# Allegro board pmtpulser.brd
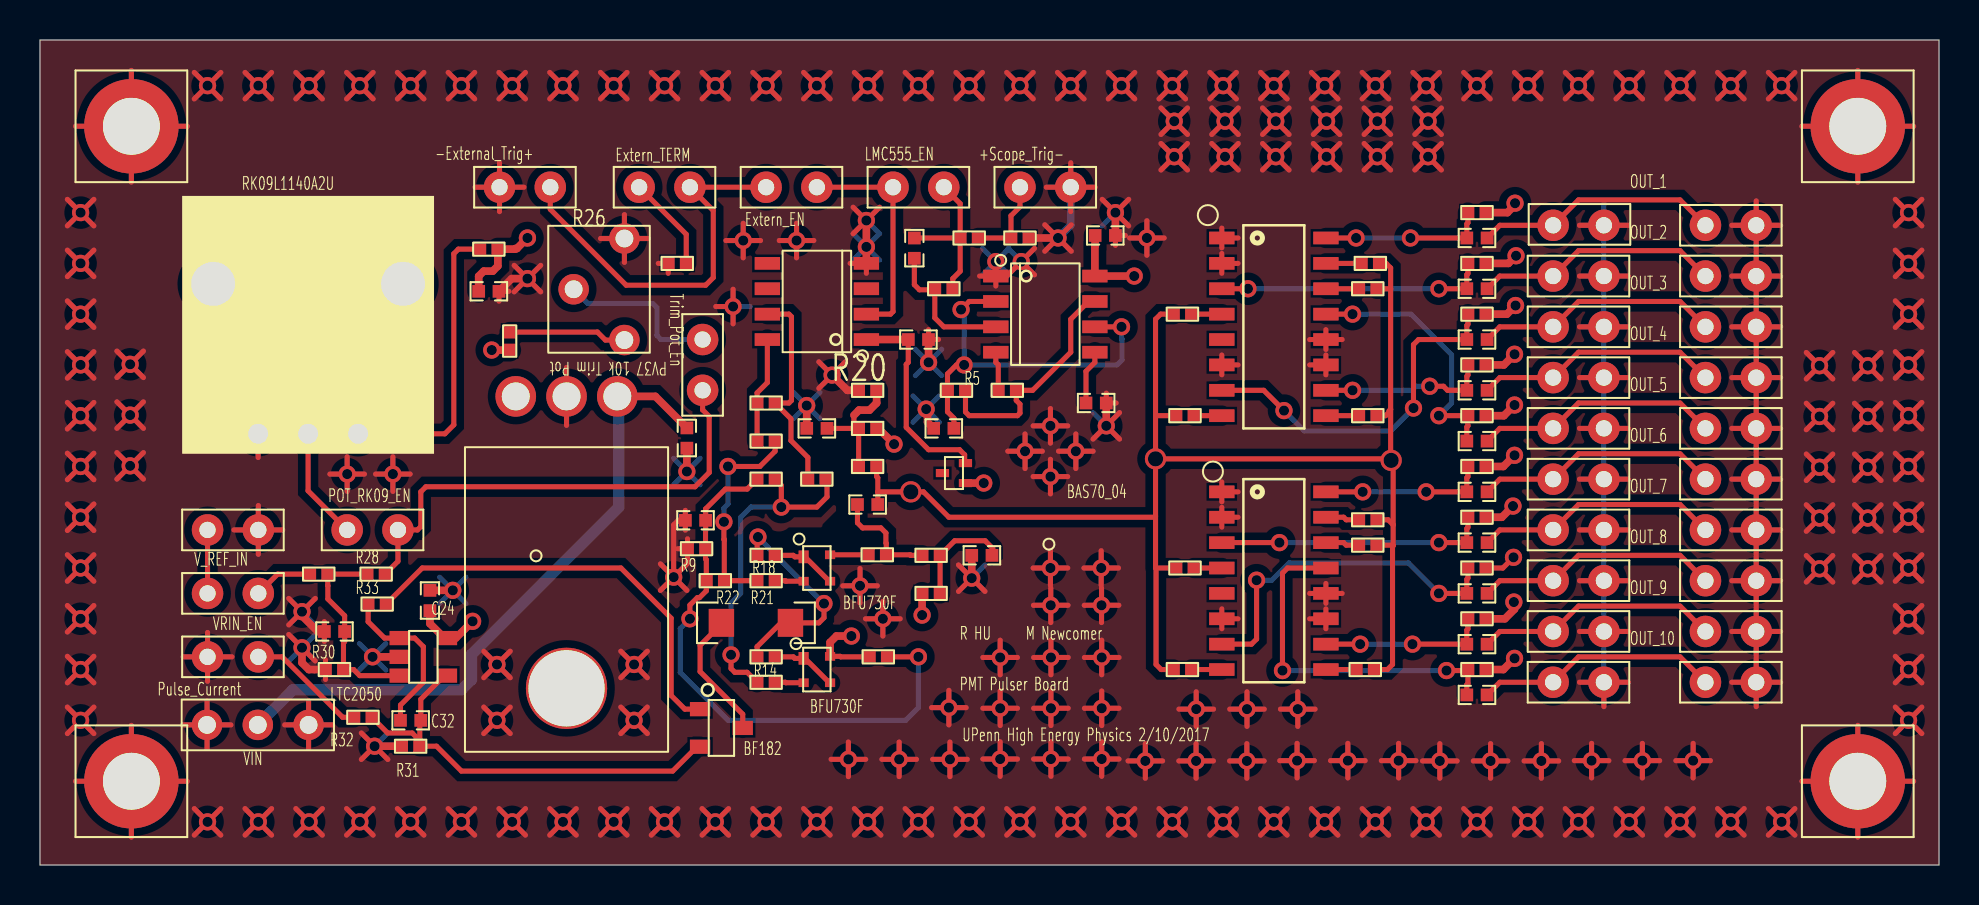
[diagram p0: board, top side]
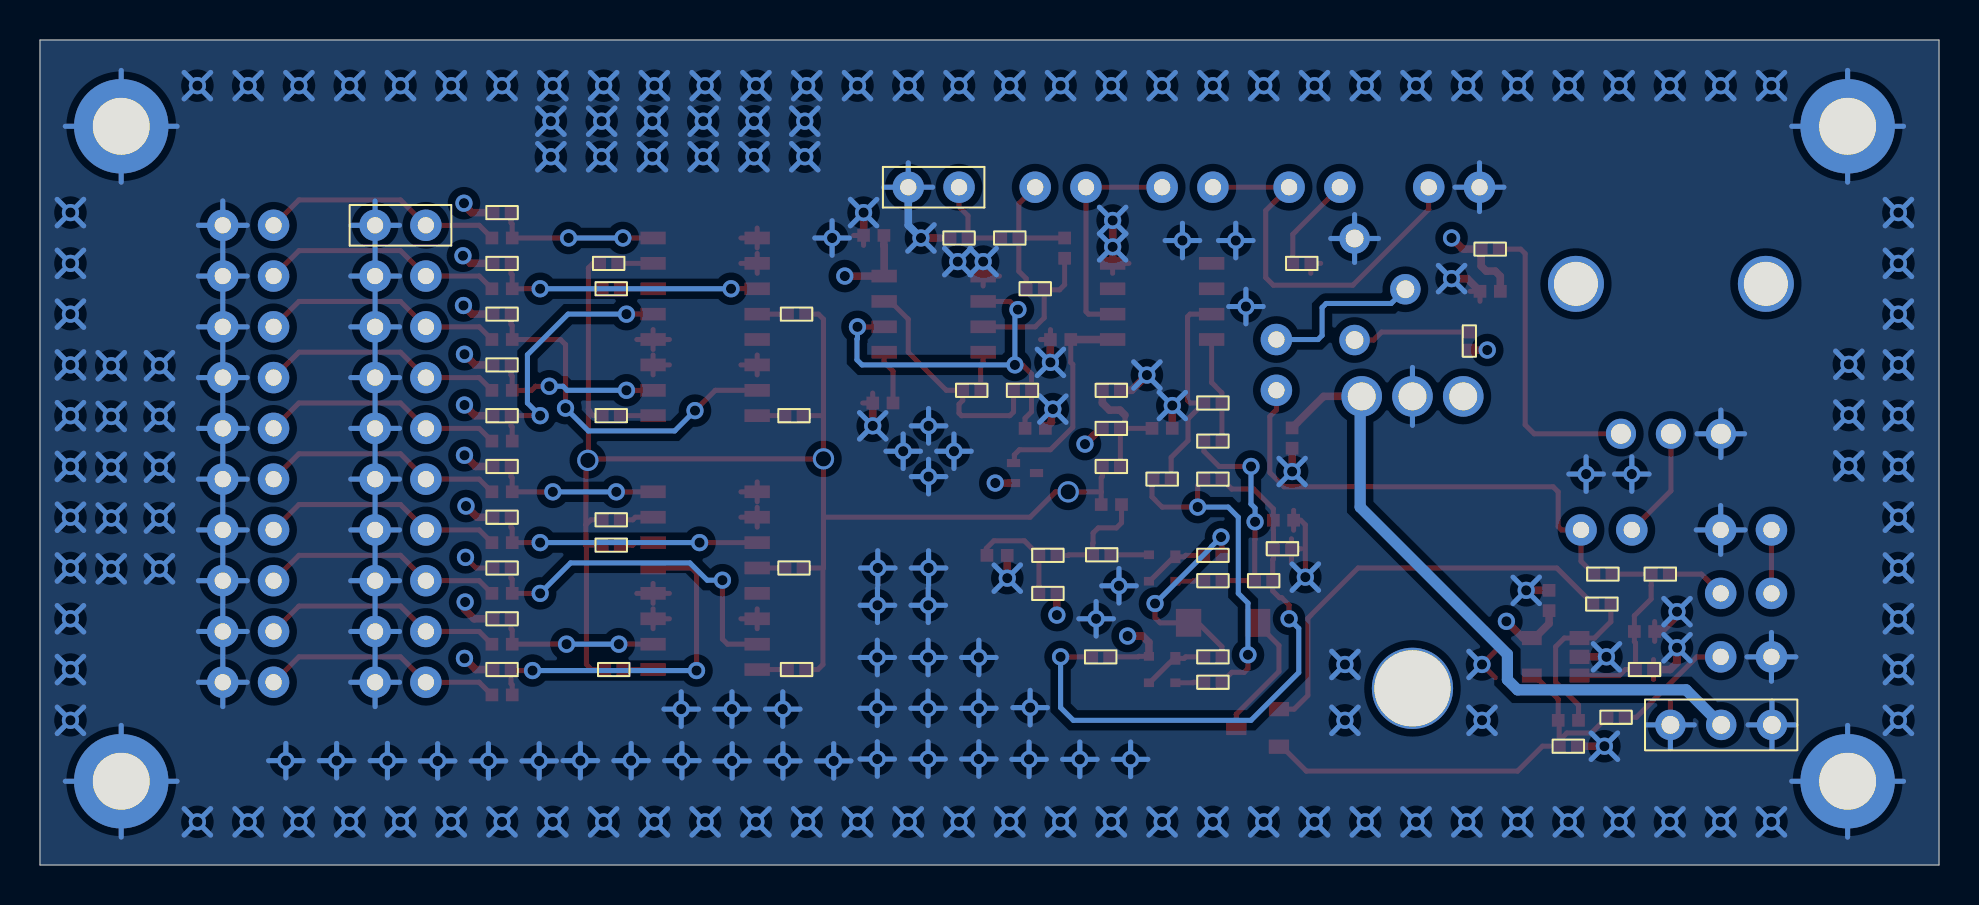
[diagram p1: board, bottom side, seen from below]

Outline 95 x 41.28 mm; copper layers: TOP, GND, VCC, BOTTOM. Coordinates in mm from the lower left corner of the outline.
Outline path: 0,41.28 0,0 95,0 95,41.28 0,41.28

## Placement (name value [footprint] x y rotation side)
C1  0.33UF  [C0402]  32.36 21.36 270 top
C2  2.2NF  [C0402]  45.21 21.84 0 top
C3  0.1UF  [C0402]  52.83 23.11 0 top
C4  10NF  [C0402]  43.94 26.29 180 top
C5  40PF  [C0402]  47.12 15.49 180 top
C6  1.0NF  [C0402]  32.79 17.25 0 top
C7  40PF  [C0402]  41.4 18.03 0 top
C8  0.1UF  [C0402]  38.86 21.84 0 top
C9  0.1UF  [C0402]  14.73 11.68 0 top
C10  2PF  [C0402]  18.54 7.24 180 top
C11  0.1UF  [C0402]  71.88 31.37 0 top
C12  0.1UF  [C0402]  71.88 28.83 0 top
C13  0.1UF  [C0402]  71.88 26.29 0 top
C14  0.1UF  [C0402]  71.88 23.75 0 top
C15  0.1UF  [C0402]  71.88 21.21 0 top
C16  0.1UF  [C0402]  71.88 18.67 0 top
C17  0.1UF  [C0402]  71.88 16.13 0 top
C18  0.1UF  [C0402]  71.88 13.59 0 top
C19  0.1UF  [C0402]  71.88 11.05 0 top
C20  0.1UF  [C0402]  71.88 8.51 0 top
C21  100PF  [C0402]  43.74 30.86 270 top
C22  0.1UF  [C0402]  22.45 28.7 0 top
C23  0.1UF  [C0402]  53.29 31.5 180 top
C24  0.1UF  [C0402]  19.51 13.23 90 top
J1  -  [CONN2]  50.29 33.91 180 bottom
J2  -  [CONN2]  31.24 33.91 0 top
J3  -  [CONN2]  24.26 33.91 0 top
J4  -  [CONN2]  43.94 33.91 180 top
J5  -  [CONN2]  37.59 33.91 0 top
J6  -  [CONN2]  33.15 25.02 270 top
J7  -  [CONN2]  16.64 16.76 0 top
J8  -  [CONN2]  9.65 16.76 180 top
J9  -  [CONN2]  9.65 13.59 0 top
J10  -  [CONN2]  9.65 10.41 0 top
J11  -  [CONN2]  76.96 32 0 bottom
J12  -  [CONN2]  76.96 29.46 0 top
J13  -  [CONN2]  76.96 26.92 0 top
J14  -  [CONN2]  76.96 24.38 0 top
J15  -  [CONN2]  76.96 21.84 0 top
J16  -  [CONN2]  76.96 19.3 0 top
J17  -  [CONN2]  76.96 16.76 0 top
J18  -  [CONN2]  76.96 14.22 0 top
J19  -  [CONN2]  76.96 11.68 0 top
J20  -  [CONN2]  76.96 9.14 0 top
J21  -  [CONN2]  84.58 32 0 top
J22  -  [CONN2]  84.58 29.46 0 top
J23  -  [CONN2]  84.58 26.92 0 top
J24  -  [CONN2]  84.58 24.38 0 top
J25  -  [CONN2]  84.58 21.84 0 top
J26  -  [CONN2]  84.58 19.3 0 top
J27  -  [CONN2]  84.58 16.76 0 top
J28  -  [CONN2]  84.58 14.22 0 top
J29  -  [CONN2]  84.58 11.68 0 top
J30  -  [CONN2]  84.58 9.14 0 top
L1  20UH  [R1206]  35.81 12.12 0 top
NOREF  -  []  95 0 90 top
NOREF#2  -  []  0 41.28 0 top
Q1  -  [TO220ABH]  28.88 23.44 90 top
R1  50  [R0402]  31.88 30.1 0 top
R2  1.5K  [R0402]  45.21 28.83 180 top
R3  750  [R0402]  46.48 31.37 180 top
R4  250  [R0402]  49.02 31.37 180 top
R5  20K  [R0402]  45.85 23.75 0 top
R6  4K  [R0402]  48.39 23.75 180 top
R7  150  [R0402]  36.32 23.11 0 top
R8  1.0K  [R0402]  41.94 10.41 180 top
R9  20  [R0402]  32.84 15.82 0 top
R10  100  [R0402]  38.86 19.3 0 top
R11  1.0K  [R0402]  36.32 19.3 0 top
R12  200  [R0402]  36.32 9.14 0 top
R13  3  [R0402]  44.58 13.59 0 top
R14  20  [R0402]  36.32 10.41 0 top
R15  80  [R0402]  44.58 15.49 0 top
R16  100  [R0402]  36.32 21.21 0 top
R17  1  [R0402]  41.88 15.52 0 top
R18  20  [R0402]  36.32 15.49 0 top
R19  3.9K  [R0402]  41.4 21.84 180 top
R20  1.0K  [R0402]  41.4 23.75 0 top
R21  200  [R0402]  36.32 14.22 0 top
R22  1.0K  [R0402]  33.78 14.22 0 top
R23  50  [R0402]  41.4 19.94 0 top
R25  1.0K  [R0402]  23.5 26.21 270 top
R26  VAL  [RESADJ]  29.24 31.34 0 top
R27  1.0K  [R0402]  22.45 30.81 0 top
R28  1.0K  [R0402]  16.81 14.55 180 top
R29  10K  [R0402]  13.94 14.55 0 top
R30  1.0K  [R0402]  14.73 9.78 0 top
R31  33  [R0402]  18.54 5.94 0 top
R32  10K  [R0402]  16.15 7.39 0 top
R33  111  [R0402]  16.87 13.06 0 top
R34  100  [R0402]  66.55 30.1 180 top
R35  100  [R0402]  66.42 28.83 180 top
R36  100  [R0402]  66.42 22.48 180 top
R37  100  [R0402]  66.42 17.27 180 top
R38  100  [R0402]  66.42 16 180 top
R39  100  [R0402]  66.29 9.78 180 top
R40  1.0K  [R0402]  71.88 22.48 180 top
R41  1.0K  [R0402]  71.88 25.02 180 top
R42  1.0K  [R0402]  71.88 9.78 180 top
R43  1.0K  [R0402]  71.88 12.32 180 top
R44  1.0K  [R0402]  71.88 32.64 180 top
R45  1.0K  [R0402]  71.88 19.94 180 top
R46  1.0K  [R0402]  71.88 30.1 0 top
R47  1.0K  [R0402]  71.88 27.56 0 top
R48  1.0K  [R0402]  71.88 17.4 0 top
R49  1.0K  [R0402]  71.88 14.86 0 top
R50  100  [R0402]  57.15 27.56 180 top
R51  100  [R0402]  57.28 22.48 180 top
R52  100  [R0402]  57.28 14.86 180 top
R53  100  [R0402]  57.15 9.78 180 top
U1  ***  [SOIC8]  50.29 27.56 0 top
U2  -  [SOIC8]  38.86 28.19 180 top
U3  -  [HSR3]  12.17 7.01 90 top
U4  -  [SOT343]  38.86 9.78 0 top
U5  -  [SOT343]  38.86 14.86 0 top
U6  -  [RK09L]  7.11 20.57 0 top
U7  -  [TSOT23-5]  19.18 10.41 0 top
U8  -  [SOT23]  34.09 6.86 0 top
U9  ***  [SOIC16]  61.72 26.92 0 top
U10  ***  [SOIC16]  61.72 14.22 0 top
U11  -  [MOUNTHOLE_4P5MM]  4.57 36.96 0 top
U12  -  [SOT523]  45.72 19.61 180 top
U13  -  [MOUNTHOLE_4P5MM]  4.57 4.19 0 top
U14  -  [MOUNTHOLE_4P5MM]  90.93 4.19 0 top
U15  -  [MOUNTHOLE_4P5MM]  90.93 36.96 0 top

## Library data of the parts
C1 = CSMD0402: part number: CSMD0402-0.33UF,10%,0402,25V
C2 = CSMD0402: part number: CSMD0402-2.2NF,10%,0402,25V
C3 C8 C9 C11-C20 C22-C24 = CSMD0402: part number: CSMD0402-0.1UF,10%,0402,25V
C4 = CSMD0402: part number: CSMD0402-10NF,10%,0402,25V
C5 C7 = CSMD0402: part number: CSMD0402-40PF,10%,0402,25V
C6 = CSMD0402: part number: CSMD0402-1.0NF,10%,0402,25V
C10 = CSMD0402: part number: CSMD0402-2PF,10%,0402,25V
C21 = CSMD0402: part number: CSMD0402-100PF,10%,0402,25V
J1-J30 = CONN2
L1 = LSMD1206: part number: LSMD1206-20UH,10%,1206
Q1 = 7806_L
R1 R23 = RSMD0402: part number: RSMD0402-50,5%,0402
R2 = RSMD0402: part number: RSMD0402-1.5K,5%,0402
R3 = RSMD0402: part number: RSMD0402-750,5%,0402
R4 = RSMD0402: part number: RSMD0402-250,5%,0402
R5 = RSMD0402: part number: RSMD0402-20K,5%,0402
R6 = RSMD0402: part number: RSMD0402-4K,5%,0402
R7 = RSMD0402: part number: RSMD0402-150,5%,0402
R8 R11 R20 R22 R25 R27 R28 R30 R40-R49 = RSMD0402: part number: RSMD0402-1K,5%,0402
R9 R14 R18 = RSMD0402: part number: RSMD0402-20,5%,0402
R10 R16 R34-R39 R50-R53 = RSMD0402: part number: RSMD0402-100,5%,0402
R12 R21 = RSMD0402: part number: RSMD0402-200,5%,0402
R13 = RSMD0402: part number: RSMD0402-3,5%,0402
R15 = RSMD0402: part number: RSMD0402-80,5%,0402
R17 = RSMD0402: part number: RSMD0402-1,5%,0402
R19 = RSMD0402: part number: RSMD0402-3.9K,5%,0402
R26 = TRIMPOT: Tolerance: ***; User Part Number: ***
R29 R32 = RSMD0402: part number: RSMD0402-10K,5%,0402
R31 = RSMD0402: part number: RSMD0402-33,5%,0402
R33 = RSMD0402: part number: RSMD0402-111,5%,0402
U1 = LMC555
U2 = ADN4661
U3 = CONN3
U4 U5 = BFU730F
U6 = RK09L: part number: RK09L-BASE
U7 = LTC2050
U8 = BFR182
U9 U10 = HFA3128B96
U11 U13-U15 = MOUNTHOLE_4P5MM
U12 = BAV99T

## Footprints (pads in the part's own frame, mm; a bottom-side part is the same pattern mirrored in y, then rotated)
C0402
  rect 0.635x0.635 smd: 1(-0.508,0) 2(0.508,0)
CONN2
  round 1.575 hole 0.813: 1(-1.27,0) 2(1.27,0)
HSR3
  round 1.524 hole 0.889: 1(0,3.81) 2(0,1.27) 3(0,-1.27)
MOUNTHOLE_4P5MM
  round 4.724 hole 2.845: 1(0,0)
R0402
  rect 0.635x0.635 smd: 1(-0.45,0) 2(0.45,0)
R1206
  rect 1.27x1.397 smd: 1(-1.727,0) 2(1.727,0)
RESADJ
  round 1.524 hole 0.889: 1(0,0) 2(-2.54,-2.54) 3(0,-5.08)
RK09L
  round 2.8 hole 2.2: 1(1.55,8.5) 2(11.05,8.5)
  round 1.508 hole 1: 3(3.8,1) 4(6.3,1) 5(8.8,1)
SOIC8
  rect 1.27x0.635 smd: 1(-2.477,1.905) 2(-2.477,0.635) 3(-2.477,-0.635) 4(-2.477,-1.905) 5(2.477,-1.905) 6(2.477,-0.635) 7(2.477,0.635) 8(2.477,1.905)
SOIC16
  rect 1.27x0.635 smd: 1(-2.603,4.445) 2(-2.603,3.175) 3(-2.603,1.905) 4(-2.603,0.635) 5(-2.603,-0.635) 6(-2.603,-1.905) 7(-2.603,-3.175) 8(-2.603,-4.445) 9(2.603,-4.445) 10(2.603,-3.175) 11(2.603,-1.905) 12(2.603,-0.635) 13(2.603,0.635) 14(2.603,1.905) 15(2.603,3.175) 16(2.603,4.445)
SOT23
  rect 1.016x0.711 smd: 1(-1.067,0.94) 2(-1.067,-0.94) 3(1.067,0)
SOT343
  rect 0.508x0.635 smd: 1(-0.66,0.559)
  rect 0.508x0.432 smd: 2(-0.66,-0.66) 3(0.66,-0.66) 4(0.66,0.66)
SOT523
  rect 0.66x0.406 smd: 1(-0.575,0.5) 2(-0.575,-0.5) 3(0.575,0)
TO220ABH
  round 2.032 hole 1.397: 1(0,0) 2(0,2.54) 3(0,5.08)
  round 4.064 hole 3.81: 4(-14.605,2.54)
TSOT23-5
  rect 0.991x0.711 smd: 1(-1.194,0.94) 2(-1.194,0) 3(-1.194,-0.94) 4(1.194,-0.94) 5(1.194,0.94)

## Nets
GND: C1.2(B<0>) C2.1(A<0>) C3.2(B<0>) C4.1(A<0>) C5.2(B<0>) C6.1(A<0>) C8.1(A<0>) C9.1(A<0>) C22.2(B<0>) C23.1(A<0>) C24.2(B<0>) J1.1 J3.1 J8.1 J10.1 J11.2 J12.2 J13.2 J14.2 J15.2 J16.2 J17.2 J18.2 J19.2 J20.2 J21.2 J22.2 J23.2 J24.2 J25.2 J26.2 J27.2 J28.2 J29.2 J30.2 Q1.2(GROUND) R1.1 R4.1 R9.1 R20.1 R26.1(A<0>) R30.1 R31.1 U1.1(GND) U2.4(GND) U3.1 U3.3 U6.3(T1) U7.2(V-) U9.1(C1) U9.2(C2) U9.6(C3) U9.11(C4) U9.12(C5) U10.1(C1) U10.2(C2) U10.6(C3) U10.11(C4) U10.12(C5) U11.1(PROBE) U13.1(PROBE) U14.1(PROBE) U15.1(PROBE)
VCC: C22.1(A<0>) C23.2(B<0>) C24.1(A<0>) Q1.3(OUTPUT) R8.2 R13.1 R19.1 R25.2 R27.2 R40.1 R41.1 R42.1 R43.1 R44.1 R45.1 R46.2 R47.2 R48.2 R49.2 U1.8(V+) U4.4 U7.5(V+) U12.1(ANODE1)
EXTERNALTRIG: J2.2 J3.2 J5.1
OUT_1: C11.1(A<0>) R44.2 U9.16(E1)
OUT_2: C12.1(A<0>) R46.1 U9.3(E2)
OUT_3: C13.1(A<0>) R47.1 U9.7(E3)
OUT_4: C14.1(A<0>) R41.2 U9.10(E4)
OUT_5: C15.1(A<0>) R40.2 U9.13(E5)
OUT_6: C16.1(A<0>) R45.2 U10.16(E1)
OUT_7: C17.1(A<0>) R48.1 U10.3(E2)
OUT_8: C18.1(A<0>) R49.1 U10.7(E3)
OUT_9: C19.1(A<0>) R43.2 U10.10(E4)
OUT_10: C20.1(A<0>) R42.2 U10.13(E5)
PAGE2: L1.1(A<0>) U8.3(COLL)
SCOPETRIG: J1.2 R3.1 R4.2
SELFTRIG: C21.1(A<0>) J4.1 R2.1 R3.2
TSTPLS: C7.2(B<0>) R23.2 R34.1 R35.1 R36.1 R37.1 R38.1 R39.1 R50.2 R51.2 R52.2 R53.2
UNNAMED_1_7806L_I119_INPUT: C1.1(A<0>) Q1.1(INPUT) U3.2
UNNAMED_1_ADN4661_I3_DIN: J4.2 J5.2 U2.2(DIN)
UNNAMED_1_ADN4661_I3_DOUT: R7.2 R10.1 U2.7(DOUT+)
UNNAMED_1_ADN4661_I3_DOUT_1: R7.1 R16.1 U2.8(DOUT-)
UNNAMED_1_ADN4661_I3_VCC: C4.2(B<0>) U2.1(VCC) U12.2(CATHODE)
UNNAMED_1_BFU730F_I5_1: R14.2 U4.1 U4.3
UNNAMED_1_BFU730F_I5_2: R12.2 U4.2
UNNAMED_1_BFU730F_I14_1: R18.2 U5.1 U5.3
UNNAMED_1_BFU730F_I14_2: R21.2 U5.2
UNNAMED_1_BFU730F_I14_4: R17.1 U5.4
UNNAMED_1_CONN2_I69_1: J2.1 R1.2
UNNAMED_1_CSMD0402_I101_A: C3.1(A<0>) U1.5(CTRL)
UNNAMED_1_CSMD0402_I102_B: C6.2(B<0>) R8.1 R9.2 R11.1 R22.1
UNNAMED_1_CSMD0402_I103_B: C8.2(B<0>) R19.2 R20.2 R23.1
UNNAMED_1_CSMD0402_I104_A: C7.1(A<0>) R15.1 R17.2
UNNAMED_1_CSMD0402_I105_A: C5.1(A<0>) R13.2 R15.2
UNNAMED_1_CSMD0402_I113_B: C21.2(B<0>) R2.2 U1.3(OUT)
UNNAMED_1_LMC555_I1_DISCH: R5.2 R6.1 U1.7(DISCH)
UNNAMED_1_LMC555_I1_RES: R6.2 U1.4(RES)
UNNAMED_1_LMC555_I1_THRESH: C2.2(B<0>) R5.1 U1.2(TRIG) U1.6(THRESH)
UNNAMED_1_LSMD1206_I107_B: L1.2(B<0>) R14.1 R18.1
UNNAMED_1_RSMD0402_I78_2: R10.2 R11.2 R12.1
UNNAMED_1_RSMD0402_I87_2: R16.2 R21.1 R22.2
UNNAMED_2_BFR182_I1_BASE: R33.2 U8.1(BASE)
UNNAMED_2_BFR182_I1_EMIT: C10.1(A<0>) R31.2 R32.2 U7.4(IN-) U8.2(EMIT)
UNNAMED_2_CONN2_I9_2: J10.2 R32.1
UNNAMED_2_CONN2_I16_2: J9.2 R29.1
UNNAMED_2_CONN2_I22_1: J6.1 R26.2(B<0>)
UNNAMED_2_CONN2_I22_2: J6.2 J7.2 R28.1
UNNAMED_2_CONN2_I23_1: J7.1 U6.4(W)
UNNAMED_2_CSMD0402_I3_B: C10.2(B<0>) R33.1 U7.1(OUT)
UNNAMED_2_CSMD0402_I13_B: C9.2(B<0>) R28.2 R29.2 R30.2 U7.3(IN+)
UNNAMED_2_RK09L_I20_T2: R27.1 U6.5(T2)
UNNAMED_2_RSMD0402_I11_1: R25.1 R26.3(C<0>)
UNNAMED_3_CONN2_I38_1: C11.2(B<0>) J11.1 J21.1
UNNAMED_3_CONN2_I49_1: C12.2(B<0>) J12.1 J22.1
UNNAMED_3_CONN2_I52_1: C13.2(B<0>) J13.1 J23.1
UNNAMED_3_CONN2_I55_1: C14.2(B<0>) J14.1 J24.1
UNNAMED_3_CONN2_I58_1: C15.2(B<0>) J15.1 J25.1
UNNAMED_3_CONN2_I61_1: C16.2(B<0>) J16.1 J26.1
UNNAMED_3_CONN2_I64_1: C17.2(B<0>) J17.1 J27.1
UNNAMED_3_CONN2_I67_1: C18.2(B<0>) J18.1 J28.1
UNNAMED_3_CONN2_I70_1: C19.2(B<0>) J19.1 J29.1
UNNAMED_3_CONN2_I73_1: C20.2(B<0>) J20.1 J30.1
UNNAMED_3_HFA3128B96_I11_B1: R34.2 U9.15(B1)
UNNAMED_3_HFA3128B96_I11_B2: R50.1 U9.4(B2)
UNNAMED_3_HFA3128B96_I11_B3: R51.1 U9.8(B3)
UNNAMED_3_HFA3128B96_I11_B4: R36.2 U9.9(B4)
UNNAMED_3_HFA3128B96_I11_B5: R35.2 U9.14(B5)
UNNAMED_3_HFA3128B96_I25_B1: R37.2 U10.15(B1)
UNNAMED_3_HFA3128B96_I25_B2: R52.1 U10.4(B2)
UNNAMED_3_HFA3128B96_I25_B3: R53.1 U10.8(B3)
UNNAMED_3_HFA3128B96_I25_B4: R39.2 U10.9(B4)
UNNAMED_3_HFA3128B96_I25_B5: R38.2 U10.14(B5)
VREFIN: J8.2 J9.1

Pads without a net: Q1 4; U2 3 5 6; U6 1 2; U9 5; U10 5; U12 3

## Via types
v1: diameter 0.864, hole 0.508, TOP to BOTTOM, 228 vias
v2: diameter 1.067, hole 0.762, TOP to BOTTOM, 3 vias

## Routing (per net, layer and track width the routed paths; a pad name or vN(x,y) marks a point on that pad's centre or on a via; arc(x,y) is an arc through that point)
GND: length 2511.1
  TOP w0.254: v1(29.72,7.24) 30.38,7.9 ; v1(29.72,7.24) 29.06,7.9 ; v1(29.72,7.24) 30.38,6.58 ; v1(29.72,7.24) 29.06,6.58 ; v1(28.7,38.99) 29.36,39.65 ; v1(28.7,38.99) 29.36,38.33 ; v1(28.7,38.99) 28.04,38.33 ; v1(28.7,38.99) 28.04,39.65 ; v1(13.46,2.16) 14.12,1.5 ; v1(13.46,2.16) 12.8,2.82 ; v1(13.46,2.16) 12.8,1.5 ; v1(13.46,2.16) 14.12,2.82 ; 66.24,37.87 v1(66.9,37.21) ; v1(66.9,37.21) 67.56,37.87 ; v1(66.9,37.21) 67.56,36.55 ; v1(66.9,37.21) 66.24,36.55 ; v1(42.16,12.32) 42.16,13.18 ; v1(42.16,12.32) 43.03,12.32 ; v1(42.16,12.32) 41.3,12.32 ; v1(42.16,12.32) 42.16,11.45 ; v1(91.43,17.36) 92.09,16.7 ; v1(91.43,17.36) 90.77,16.7 ; v1(91.43,17.36) 90.77,18.02 ; v1(91.43,17.36) 92.09,18.02 ; v1(17.65,19.56) 18.52,19.56 ; v1(17.65,19.56) 16.79,19.56 ; v1(17.65,19.56) 17.65,18.69 ; v1(17.65,19.56) 17.65,20.42 ; v1(53.09,14.86) 53.09,15.72 ; v1(53.09,14.86) 53.09,13.99 ; v1(53.09,14.86) 53.95,14.86 ; v1(53.09,14.86) 52.22,14.86 ; v1(46.48,2.16) 47.14,1.5 ; v1(46.48,2.16) 47.14,2.82 ; v1(46.48,2.16) 45.82,1.5 ; v1(46.48,2.16) 45.82,2.82 ; U14.1 93.73,4.19 ; U14.1 90.93,6.99 ; U14.1 90.93,1.4 ; U14.1 88.14,4.19 ; v1(69.44,37.21) 70.1,37.87 ; v1(69.44,37.21) 68.78,36.55 ; v1(69.44,37.21) 68.78,37.87 ; v1(69.44,37.21) 70.1,36.55 ; 17.88,1.5 v1(18.54,2.16) ; v1(18.54,2.16) 17.88,2.82 ; v1(18.54,2.16) 19.2,1.5 ; v1(18.54,2.16) 19.2,2.82 ; J1.1 52.78,33.91 ; J1.1 50.34,33.91 ; J1.1 51.56,35.13 ; J1.1 51.56,32.69 ; 10.26,1.5 v1(10.92,2.16) ; v1(10.92,2.16) 11.58,2.82 ; v1(10.92,2.16) 11.58,1.5 ; v1(10.92,2.16) 10.26,2.82 ; v1(66.8,2.16) 67.46,1.5 ; v1(66.8,2.16) 67.46,2.82 ; v1(66.8,2.16) 66.14,2.82 ; v1(66.8,2.16) 66.14,1.5 ; v1(23.62,2.16) 24.28,2.82 ; v1(23.62,2.16) 22.96,1.5 ; v1(23.62,2.16) 22.96,2.82 ; v1(23.62,2.16) 24.28,1.5 ; 42.98,4.42 v1(42.98,5.29) ; v1(42.98,5.29) 43.84,5.29 ; v1(42.98,5.29) 42.12,5.29 ; v1(42.98,5.29) 42.98,6.15 ; 50.55,21.11 v1(50.55,21.97) ; v1(50.55,21.97) 50.55,22.84 ; v1(50.55,21.97) 51.41,21.97 ; v1(50.55,21.97) 49.68,21.97 ; 86.46,2.82 v1(87.12,2.16) ; v1(87.12,2.16) 87.78,1.5 ; v1(87.12,2.16) 87.78,2.82 ; v1(87.12,2.16) 86.46,1.5 ; 35.66,1.5 v1(36.32,2.16) ; v1(36.32,2.16) 36.98,1.5 ; v1(36.32,2.16) 36.98,2.82 ; v1(36.32,2.16) 35.66,2.82 ; 50.57,4.44 v1(50.57,5.3) ; v1(50.57,5.3) 51.44,5.3 ; v1(50.57,5.3) 50.57,6.17 ; v1(50.57,5.3) 49.71,5.3 ; 77.01,24.38 J14.2 79.45,24.38 ; v1(48.03,7.84) 48.9,7.84 ; v1(48.03,7.84) 48.03,6.98 ; v1(48.03,7.84) 47.17,7.84 ; v1(48.03,7.84) 48.03,8.71 ; 85.85,30.78 J21.2 ; J21.2 84.63,32 ; J21.2 87.07,32 ; J21.2 85.85,33.22 ; 26.34,24.89 Q1.2 26.34,22 ; v1(64.26,2.16) 64.92,1.5 ; v1(64.26,2.16) 63.6,2.82 ; v1(64.26,2.16) 63.6,1.5 ; v1(64.26,2.16) 64.92,2.82 ; v1(2.03,7.24) 2.69,7.9 ; v1(2.03,7.24) 1.37,7.9 ; v1(2.03,7.24) 2.69,6.58 ; v1(2.03,7.24) 1.37,6.58 ; 49.28,19.84 v1(49.28,20.7) ; v1(49.28,20.7) 49.28,21.57 ; v1(49.28,20.7) 48.41,20.7 ; v1(49.28,20.7) 50.14,20.7 ; 1.37,15.52 v1(2.03,14.86) ; v1(2.03,14.86) 2.69,14.2 ; v1(2.03,14.86) 2.69,15.52 ; v1(2.03,14.86) 1.37,14.2 ; v1(93.47,9.78) 94.13,10.44 ; v1(93.47,9.78) 94.13,9.12 ; v1(93.47,9.78) 92.81,9.12 ; v1(93.47,9.78) 92.81,10.44 ; 29.24,30.15 R26.1 ; R26.1 30.43,31.34 ; R26.1 28.04,31.34 ; R26.1 29.24,32.54 ; v1(53.11,10.38) 53.98,10.38 ; v1(53.11,10.38) 53.11,9.52 ; v1(53.11,10.38) 52.25,10.38 ; v1(53.11,10.38) 53.11,11.25 ; v1(69.34,38.99) 70,39.65 ; v1(69.34,38.99) 68.68,39.65 ; v1(69.34,38.99) 68.68,38.33 ; v1(69.34,38.99) 70,38.33 ; v1(93.47,19.94) 94.13,19.28 ; v1(93.47,19.94) 94.13,20.6 ; v1(93.47,19.94) 92.81,19.28 ; v1(93.47,19.94) 92.81,20.6 ; 31.43,29.6 R1.1 30.93,30.1 ; v1(2.03,27.56) 2.69,28.22 ; v1(2.03,27.56) 1.37,28.22 ; v1(2.03,27.56) 2.69,26.9 ; v1(2.03,27.56) 1.37,26.9 ; 61.06,39.65 v1(61.72,38.99) ; v1(61.72,38.99) 62.38,39.65 ; v1(61.72,38.99) 61.06,38.33 ; v1(61.72,38.99) 62.38,38.33 ; 8.36,5.82 U3.1 ; U3.1 8.36,8.2 ; U3.1 7.16,7.01 ; U3.1 9.55,7.01 ; v1(50.55,14.86) 50.55,15.72 ; v1(50.55,14.86) 50.55,13.99 ; v1(50.55,14.86) 51.41,14.86 ; v1(50.55,14.86) 49.68,14.86 ; v1(61.82,35.43) 62.48,36.1 ; v1(61.82,35.43) 61.16,36.1 ; v1(61.82,35.43) 62.48,34.77 ; v1(61.82,35.43) 61.16,34.77 ; 12.8,38.33 v1(13.46,38.99) ; v1(13.46,38.99) 14.12,39.65 ; v1(13.46,38.99) 14.12,38.33 ; v1(13.46,38.99) 12.8,39.65 ; 83.92,1.5 v1(84.58,2.16) ; v1(84.58,2.16) 83.92,2.82 ; v1(84.58,2.16) 85.24,2.82 ; v1(84.58,2.16) 85.24,1.5 ; 1.37,9.12 v1(2.03,9.78) ; v1(2.03,9.78) 2.69,10.44 ; v1(2.03,9.78) 2.69,9.12 ; v1(2.03,9.78) 1.37,10.44 ; v1(69.44,35.43) 70.1,36.1 ; v1(69.44,35.43) 68.78,36.1 ; v1(69.44,35.43) 68.78,34.77 ; v1(69.44,35.43) 70.1,34.77 ; 14.28,10.27 R30.1 14.28,9.28 ; v1(45.47,7.87) 45.47,8.74 ; v1(45.47,7.87) 45.47,7.01 ; v1(45.47,7.87) 44.6,7.87 ; v1(45.47,7.87) 46.33,7.87 ; 59.12,29.6 U9.2 ; U9.2 59.93,30.1 ; U9.2 59.12,30.59 ; 77.01,29.46 J12.2 79.45,29.46 ; 88.36,19.24 v1(89.02,19.9) ; v1(89.02,19.9) 89.68,19.24 ; v1(89.02,19.9) 88.36,20.56 ; v1(89.02,19.9) 89.68,20.56 ; 22.96,38.33 v1(23.62,38.99) ; v1(23.62,38.99) 22.96,39.65 ; v1(23.62,38.99) 24.28,39.65 ; v1(23.62,38.99) 24.28,38.33 ; v1(13.11,12.67) 13.77,13.34 ; v1(13.11,12.67) 12.44,12.01 ; v1(13.11,12.67) 12.44,13.34 ; 52.68,21.31 v1(53.34,21.97) ; v1(53.34,21.97) 54,21.31 ; v1(53.34,21.97) 54,22.63 ; 71.7,5.21 v1(72.56,5.21) ; v1(72.56,5.21) 72.56,6.07 ; v1(72.56,5.21) 72.56,4.34 ; v1(72.56,5.21) 73.43,5.21 ; 79.45,11.68 J19.2 77.01,11.68 ; 53.14,33.3 v1(53.8,32.64) ; v1(53.8,32.64) 54.46,31.98 ; v1(53.8,32.64) 54.46,33.3 ; v1(46.48,38.99) 47.14,38.33 ; v1(46.48,38.99) 47.14,39.65 ; v1(46.48,38.99) 45.82,39.65 ; v1(46.48,38.99) 45.82,38.33 ; v1(76.96,38.99) 77.62,38.33 ; v1(76.96,38.99) 77.62,39.65 ; v1(76.96,38.99) 76.3,39.65 ; v1(76.96,38.99) 76.3,38.33 ; v1(2.03,22.48) 2.69,21.82 ; v1(2.03,22.48) 1.37,21.82 ; v1(2.03,22.48) 1.37,23.14 ; v1(2.03,22.48) 2.69,23.14 ; 63.51,26.29 U9.12 ; U9.12 64.33,25.79 ; U9.12 65.14,26.29 ; U9.12 64.33,26.78 ; 76.3,2.82 v1(76.96,2.16) ; v1(76.96,2.16) 77.62,2.82 ; v1(76.96,2.16) 77.62,1.5 ; v1(76.96,2.16) 76.3,1.5 ; v1(4.51,22.51) 5.17,23.17 ; v1(4.51,22.51) 3.85,21.85 ; v1(4.51,22.51) 5.17,21.85 ; v1(4.51,22.51) 3.85,23.17 ; 56.08,36.1 v1(56.74,35.43) ; v1(56.74,35.43) 56.08,34.77 ; v1(56.74,35.43) 57.4,36.1 ; v1(56.74,35.43) 57.4,34.77 ; 33.81,27.94 v1(34.67,27.94) ; v1(34.67,27.94) 34.67,27.08 ; v1(34.67,27.94) 34.67,28.8 ; 23.72,30 v1(24.38,29.34) ; v1(24.38,29.34) 25.05,30 ; v1(24.38,29.34) 23.72,28.68 ; v1(24.38,29.34) 25.05,28.68 ; 3.85,19.31 v1(4.51,19.97) ; v1(4.51,19.97) 5.17,19.31 ; v1(4.51,19.97) 5.17,20.63 ; v1(4.51,19.97) 3.85,20.63 ; v1(48.03,5.3) 48.9,5.3 ; v1(48.03,5.3) 47.17,5.3 ; v1(48.03,5.3) 48.03,6.17 ; v1(48.03,5.3) 48.03,4.44 ; 20.42,39.65 v1(21.08,38.99) ; v1(21.08,38.99) 21.74,39.65 ; v1(21.08,38.99) 20.42,38.33 ; v1(21.08,38.99) 21.74,38.33 ; 55.98,39.65 v1(56.64,38.99) ; v1(56.64,38.99) 57.3,39.65 ; v1(56.64,38.99) 55.98,38.33 ; v1(56.64,38.99) 57.3,38.33 ; v1(65.42,5.22) 66.29,5.22 ; v1(65.42,5.22) 65.42,6.09 ; v1(65.42,5.22) 65.42,4.36 ; v1(65.42,5.22) 64.56,5.22 ; 92.81,29.44 v1(93.47,30.1) ; v1(93.47,30.1) 94.13,29.44 ; v1(93.47,30.1) 94.13,30.76 ; v1(93.47,30.1) 92.81,30.76 ; J29.2 85.85,12.9 ; J29.2 85.85,10.46 ; J29.2 87.07,11.68 ; J29.2 84.63,11.68 ; J22.2 85.85,30.68 ; J22.2 84.63,29.46 ; J22.2 85.85,28.24 ; J22.2 87.07,29.46 ; v1(50.56,12.99) 50.56,13.86 ; v1(50.56,12.99) 51.43,12.99 ; v1(50.56,12.99) 49.7,12.99 ; v1(50.56,12.99) 50.56,12.13 ; 90.77,25.64 v1(91.43,24.98) ; v1(91.43,24.98) 92.09,24.32 ; v1(91.43,24.98) 90.77,24.32 ; v1(91.43,24.98) 92.09,25.64 ; 47,29.46 U1.1 ; U1.1 47.88,29.46 47.97,29.37 48.27,29.37 v1(49.09,30.19) ; U1.1 47.82,28.97 ; U1.1 v1(47.82,30.19) ; 59.51,7.8 v1(60.38,7.8) ; v1(60.38,7.8) 60.38,6.94 ; v1(60.38,7.8) 60.38,8.66 ; v1(60.38,7.8) 61.24,7.8 ; 84.63,16.76 J27.2 ; J27.2 87.07,16.76 ; J27.2 85.85,15.54 ; J27.2 85.85,17.98 ; 92.81,15.52 v1(93.47,14.86) ; v1(93.47,14.86) 94.13,15.52 ; v1(93.47,14.86) 92.81,14.2 ; v1(93.47,14.86) 94.13,14.2 ; v1(67.96,5.22) 68.83,5.22 ; v1(67.96,5.22) 67.96,4.36 ; v1(67.96,5.22) 67.96,6.09 ; v1(67.96,5.22) 67.1,5.22 ; v1(91.43,19.9) 92.09,20.56 ; v1(91.43,19.9) 90.77,19.24 ; v1(91.43,19.9) 92.09,19.24 ; v1(91.43,19.9) 90.77,20.56 ; U10.1 59.93,18.67 ; U10.1 59.12,18.17 ; U10.1 59.12,19.16 ; 58.62,34.77 v1(59.28,35.43) ; v1(59.28,35.43) 59.94,34.77 ; v1(59.28,35.43) 59.94,36.1 ; v1(59.28,35.43) 58.62,36.1 ; 58.62,37.87 v1(59.28,37.21) ; v1(59.28,37.21) 59.94,36.55 ; v1(59.28,37.21) 58.62,36.55 ; v1(59.28,37.21) 59.94,37.87 ; v1(84.58,38.99) 85.24,39.65 ; v1(84.58,38.99) 85.24,38.33 ; v1(84.58,38.99) 83.92,39.65 ; v1(84.58,38.99) 83.92,38.33 ; v1(31.7,14.4) 31.7,17.02 31.93,17.25 C6.1 ; v1(31.7,14.4) 31.04,13.74 ; v1(31.7,14.4) 32.36,13.74 ; v1(31.7,14.4) 32.39,15.09 R9.1 ; v1(31.7,14.4) 31.04,15.06 ; 58.52,39.65 v1(59.18,38.99) ; v1(59.18,38.99) 59.84,39.65 ; v1(59.18,38.99) 58.52,38.33 ; v1(59.18,38.99) 59.84,38.33 ; v1(2.03,30.1) 2.69,29.44 ; v1(2.03,30.1) 2.69,30.76 ; v1(2.03,30.1) 1.37,30.76 ; v1(2.03,30.1) 1.37,29.44 ; 14.22,12.18 C9.1 14.22,11.19 ; 81.38,38.33 v1(82.04,38.99) ; v1(82.04,38.99) 82.7,38.33 ; v1(82.04,38.99) 81.38,39.65 ; v1(82.04,38.99) 82.7,39.65 ; v1(51.56,2.16) 52.22,2.82 ; v1(51.56,2.16) 50.9,1.5 ; v1(51.56,2.16) 52.22,1.5 ; v1(51.56,2.16) 50.9,2.82 ; v1(49.09,30.19) 49.75,29.53 ; v1(49.09,30.19) 49.75,30.85 ; v1(50.57,10.38) 51.44,10.38 ; v1(50.57,10.38) 50.57,11.25 ; v1(50.57,10.38) 49.71,10.38 ; v1(50.57,10.38) 50.57,9.52 ; U10.2 59.93,17.4 ; U10.2 59.12,17.89 ; U10.2 59.12,16.9 ; 59.12,24.52 U9.6 ; U9.6 59.12,25.51 ; U9.6 59.93,25.02 ; 36.98,31.24 v1(37.85,31.24) ; v1(37.85,31.24) 37.85,32.11 ; v1(37.85,31.24) 38.71,31.24 ; v1(37.85,31.24) 37.85,30.38 ; 38.2,38.33 v1(38.86,38.99) ; v1(38.86,38.99) 38.2,39.65 ; v1(38.86,38.99) 39.52,38.33 ; v1(38.86,38.99) 39.52,39.65 ; v1(28.7,2.16) 29.36,2.82 ; v1(28.7,2.16) 29.36,1.5 ; v1(28.7,2.16) 28.04,1.5 ; v1(28.7,2.16) 28.04,2.82 ; 63.51,12.32 U10.11 ; U10.11 64.33,12.81 ; U10.11 64.33,11.82 ; v1(26.16,38.99) 26.82,39.65 ; v1(26.16,38.99) 25.5,39.65 ; v1(26.16,38.99) 26.82,38.33 ; v1(26.16,38.99) 25.5,38.33 ; v1(10.92,38.99) 11.58,38.33 ; v1(10.92,38.99) 10.26,39.65 ; v1(10.92,38.99) 11.58,39.65 ; v1(10.92,38.99) 10.26,38.33 ; v1(2.03,32.64) 2.69,33.3 ; v1(2.03,32.64) 2.69,31.98 ; v1(2.03,32.64) 1.37,31.98 ; v1(2.03,32.64) 1.37,33.3 ; 40.74,39.65 v1(41.4,38.99) ; v1(41.4,38.99) 42.06,39.65 ; v1(41.4,38.99) 42.06,38.33 ; v1(41.4,38.99) 40.74,38.33 ; 79.45,19.3 J16.2 77.01,19.3 ; 77.62,4.36 v1(77.62,5.22) ; v1(77.62,5.22) 78.48,5.22 ; v1(77.62,5.22) 76.75,5.22 ; v1(77.62,5.22) 77.62,6.09 ; v1(66.9,35.43) 67.56,36.1 ; v1(66.9,35.43) 66.24,36.1 ; v1(66.9,35.43) 67.56,34.77 ; v1(66.9,35.43) 66.24,34.77 ; 30.58,1.5 v1(31.24,2.16) ; v1(31.24,2.16) 31.9,2.82 ; v1(31.24,2.16) 31.9,1.5 ; v1(31.24,2.16) 30.58,2.82 ; J10.1 8.38,11.63 ; J10.1 7.16,10.41 ; J10.1 8.38,9.19 ; J10.1 9.6,10.41 ; 16.08,6.61 v1(16.74,5.94) ; v1(16.74,5.94) 17.4,5.28 ; v1(16.74,5.94) 16.08,5.28 ; 62.92,6.94 v1(62.92,7.8) ; v1(62.92,7.8) 62.05,7.8 ; v1(62.92,7.8) 63.78,7.8 ; v1(62.92,7.8) 62.92,8.66 ; 63.6,38.33 v1(64.26,38.99) ; v1(64.26,38.99) 64.92,38.33 ; v1(64.26,38.99) 63.6,39.65 ; v1(64.26,38.99) 64.92,39.65 ; v1(43.94,38.99) 44.6,39.65 ; v1(43.94,38.99) 43.28,39.65 ; v1(43.94,38.99) 43.28,38.33 ; v1(43.94,38.99) 44.6,38.33 ; 92.81,26.9 v1(93.47,27.56) ; v1(93.47,27.56) 92.81,28.22 ; v1(93.47,27.56) 94.13,26.9 ; v1(93.47,27.56) 94.13,28.22 ; v1(89.02,17.36) 89.68,18.02 ; v1(89.02,17.36) 89.68,16.7 ; v1(89.02,17.36) 88.36,16.7 ; v1(89.02,17.36) 88.36,18.02 ; v1(40.44,5.29) 40.44,6.15 ; v1(40.44,5.29) 39.58,5.29 ; v1(40.44,5.29) 41.3,5.29 ; v1(40.44,5.29) 40.44,4.42 ; 79.45,21.84 J15.2 77.01,21.84 ; v1(53.1,12.99) 53.1,13.86 ; v1(53.1,12.99) 53.1,12.13 ; v1(53.1,12.99) 52.24,12.99 ; v1(53.1,12.99) 53.97,12.99 ; 49.71,7.84 v1(50.57,7.84) ; v1(50.57,7.84) 50.57,6.98 ; v1(50.57,7.84) 50.57,8.71 ; v1(50.57,7.84) 51.44,7.84 ; 63.7,36.1 v1(64.36,35.43) ; v1(64.36,35.43) 63.7,34.77 ; v1(64.36,35.43) 65.02,34.77 ; v1(64.36,35.43) 65.02,36.1 ; v1(55.37,31.37) 55.37,32.23 ; v1(55.37,31.37) 54.51,31.37 ; v1(55.37,31.37) 55.37,30.5 ; v1(55.37,31.37) 56.24,31.37 ; 44.95,26.29 C4.1 44.45,26.78 ; U15.1 90.93,39.75 ; U15.1 90.93,34.16 ; U15.1 93.73,36.96 ; U15.1 88.14,36.96 ; 3.85,24.39 v1(4.51,25.05) ; v1(4.51,25.05) 5.17,25.71 ; v1(4.51,25.05) 5.17,24.39 ; v1(4.51,25.05) 3.85,25.71 ; 88.36,15.48 v1(89.02,14.82) ; v1(89.02,14.82) 88.36,14.16 ; v1(89.02,14.82) 89.68,14.16 ; v1(89.02,14.82) 89.68,15.48 ; J24.2 87.07,24.38 ; J24.2 85.85,23.16 ; J24.2 84.63,24.38 ; J24.2 85.85,25.6 ; v1(18.54,38.99) 19.2,39.65 ; v1(18.54,38.99) 17.88,38.33 ; v1(18.54,38.99) 17.88,39.65 ; v1(18.54,38.99) 19.2,38.33 ; v1(79.5,38.99) 80.16,39.65 ; v1(79.5,38.99) 78.84,39.65 ; v1(79.5,38.99) 80.16,38.33 ; v1(79.5,38.99) 78.84,38.33 ; v1(69.34,2.16) 70,1.5 ; v1(69.34,2.16) 70,2.82 ; v1(69.34,2.16) 68.68,2.82 ; v1(69.34,2.16) 68.68,1.5 ; v1(70.02,5.21) 70.02,6.07 ; v1(70.02,5.21) 70.02,4.34 ; v1(70.02,5.21) 69.16,5.21 ; v1(70.02,5.21) 70.89,5.21 ; U10.6 59.93,12.32 ; U10.6 59.12,12.81 ; U10.6 59.12,11.82 ; J26.2 87.07,19.3 ; J26.2 84.63,19.3 ; J26.2 85.85,18.08 ; J26.2 85.85,20.52 ; J25.2 85.85,23.06 ; J25.2 87.07,21.84 ; J25.2 84.63,21.84 ; J25.2 85.85,20.62 ; 56.97,5.21 v1(57.83,5.21) ; v1(57.83,5.21) 58.7,5.21 ; v1(57.83,5.21) 57.83,6.07 ; v1(57.83,5.21) 57.83,4.34 ; 53.44,2.82 v1(54.1,2.16) ; v1(54.1,2.16) 54.76,1.5 ; v1(54.1,2.16) 53.44,1.5 ; v1(54.1,2.16) 54.76,2.82 ; v1(89.02,24.98) 89.68,25.64 ; v1(89.02,24.98) 88.36,25.64 ; v1(89.02,24.98) 89.68,24.32 ; v1(89.02,24.98) 88.36,24.32 ; 25.5,2.82 v1(26.16,2.16) ; v1(26.16,2.16) 26.82,1.5 ; v1(26.16,2.16) 26.82,2.82 ; v1(26.16,2.16) 25.5,1.5 ; v1(59.18,2.16) 59.84,2.82 ; v1(59.18,2.16) 58.52,1.5 ; v1(59.18,2.16) 58.52,2.82 ; v1(59.18,2.16) 59.84,1.5 ; v1(2.03,19.94) 2.69,19.28 ; v1(2.03,19.94) 1.37,20.6 ; v1(2.03,19.94) 2.69,20.6 ; v1(2.03,19.94) 1.37,19.28 ; 92.81,25.68 v1(93.47,25.02) ; v1(93.47,25.02) 94.13,24.36 ; v1(93.47,25.02) 94.13,25.68 ; v1(93.47,25.02) 92.81,24.36 ; v1(64.36,37.21) 65.02,36.55 ; v1(64.36,37.21) 63.7,36.55 ; v1(64.36,37.21) 65.02,37.87 ; v1(64.36,37.21) 63.7,37.87 ; 92.81,31.98 v1(93.47,32.64) ; v1(93.47,32.64) 94.13,31.98 ; v1(93.47,32.64) 92.81,33.3 ; v1(93.47,32.64) 94.13,33.3 ; 50.9,39.65 v1(51.56,38.99) ; v1(51.56,38.99) 52.22,39.65 ; v1(51.56,38.99) 52.22,38.33 ; v1(51.56,38.99) 50.9,38.33 ; v1(60.37,5.21) 61.24,5.21 ; v1(60.37,5.21) 60.37,4.34 ; v1(60.37,5.21) 59.51,5.21 ; v1(60.37,5.21) 60.37,6.07 ; 1.37,16.74 v1(2.03,17.4) ; v1(2.03,17.4) 1.37,18.06 ; v1(2.03,17.4) 2.69,18.06 ; v1(2.03,17.4) 2.69,16.74 ; v1(49.02,38.99) 49.68,39.65 ; v1(49.02,38.99) 48.36,38.33 ; v1(49.02,38.99) 49.68,38.33 ; v1(49.02,38.99) 48.36,39.65 ; 22.2,10.69 v1(22.86,10.03) ; v1(22.86,10.03) 22.2,9.37 ; v1(22.86,10.03) 23.52,9.37 ; v1(22.86,10.03) 23.52,10.69 ; 34.31,31.24 v1(35.18,31.24) ; v1(35.18,31.24) 35.18,32.11 ; v1(35.18,31.24) 36.04,31.24 ; v1(35.18,31.24) 35.18,30.38 ; 15.34,2.82 v1(16,2.16) ; v1(16,2.16) 15.34,1.5 ; v1(16,2.16) 16.66,2.82 ; v1(16,2.16) 16.66,1.5 ; U3.3 13.44,8.2 ; U3.3 14.63,7.01 ; U3.3 13.44,5.82 ; U3.3 12.24,7.01 ; 20.42,1.5 v1(21.08,2.16) ; v1(21.08,2.16) 20.42,2.82 ; v1(21.08,2.16) 21.74,1.5 ; v1(21.08,2.16) 21.74,2.82 ; 79.29,5.22 v1(80.16,5.22) ; v1(80.16,5.22) 80.16,4.36 ; v1(80.16,5.22) 80.16,6.09 ; v1(80.16,5.22) 81.02,5.22 ; v1(31.24,38.99) 31.9,39.65 ; v1(31.24,38.99) 30.58,38.33 ; v1(31.24,38.99) 30.58,39.65 ; v1(31.24,38.99) 31.9,38.33 ; v1(61.82,37.21) 62.48,36.55 ; v1(61.82,37.21) 62.48,37.87 ; v1(61.82,37.21) 61.16,36.55 ; v1(61.82,37.21) 61.16,37.87 ; v1(91.43,14.82) 92.09,14.16 ; v1(91.43,14.82) 90.77,14.16 ; v1(91.43,14.82) 90.77,15.48 ; v1(91.43,14.82) 92.09,15.48 ; 50.27,32.03 v1(50.93,31.37) ; v1(50.93,31.37) 51.59,32.03 ; v1(50.93,31.37) 50.27,30.71 ; v1(50.93,31.37) 51.59,30.71 ; 84.63,26.92 J23.2 ; J23.2 87.07,26.92 ; J23.2 85.85,28.14 ; J23.2 85.85,25.7 ; v1(2.03,12.32) 2.69,11.66 ; v1(2.03,12.32) 1.37,12.98 ; v1(2.03,12.32) 2.69,12.98 ; v1(2.03,12.32) 1.37,11.66 ; 38.96,23.85 v1(39.62,24.51) ; v1(39.62,24.51) 38.96,25.17 ; v1(39.62,24.51) 40.29,25.17 ; 53.84,23.11 C3.2 53.34,23.61 ; 47.17,10.38 v1(48.03,10.38) ; v1(48.03,10.38) 48.03,11.25 ; v1(48.03,10.38) 48.03,9.52 ; v1(48.03,10.38) 48.9,10.38 ; 23.46,28.7 C22.2 22.96,28.21 ; 33.12,1.5 v1(33.78,2.16) ; v1(33.78,2.16) 34.44,2.82 ; v1(33.78,2.16) 34.44,1.5 ; v1(33.78,2.16) 33.12,2.82 ; 85.85,13 J28.2 ; J28.2 87.07,14.22 ; J28.2 85.85,15.44 ; J28.2 84.63,14.22 ; 92.81,16.74 v1(93.47,17.4) ; v1(93.47,17.4) 94.13,18.06 ; v1(93.47,17.4) 92.81,18.06 ; v1(93.47,17.4) 94.13,16.74 ; 92.81,11.66 v1(93.47,12.32) ; v1(93.47,12.32) 92.81,12.98 ; v1(93.47,12.32) 94.13,11.66 ; v1(93.47,12.32) 94.13,12.98 ; 40.74,2.82 v1(41.4,2.16) ; v1(41.4,2.16) 42.06,1.5 ; v1(41.4,2.16) 42.06,2.82 ; v1(41.4,2.16) 40.74,1.5 ; 14.5,19.56 v1(15.37,19.56) ; v1(15.37,19.56) 16.23,19.56 ; v1(15.37,19.56) 15.37,18.69 ; v1(15.37,19.56) 15.37,20.42 ; v1(49.02,2.16) 49.68,1.5 ; v1(49.02,2.16) 48.36,2.82 ; v1(49.02,2.16) 49.68,2.82 ; v1(49.02,2.16) 48.36,1.5 ; 92.81,21.82 v1(93.47,22.48) ; v1(93.47,22.48) 94.13,21.82 ; v1(93.47,22.48) 92.81,23.14 ; v1(93.47,22.48) 94.13,23.14 ; 7.72,1.5 v1(8.38,2.16) ; v1(8.38,2.16) 9.04,1.5 ; v1(8.38,2.16) 7.72,2.82 ; v1(8.38,2.16) 9.04,2.82 ; v1(62.88,5.22) 62.88,6.09 ; v1(62.88,5.22) 63.75,5.22 ; v1(62.88,5.22) 62.02,5.22 ; v1(62.88,5.22) 62.88,4.36 ; 52.25,7.84 v1(53.11,7.84) ; v1(53.11,7.84) 53.11,6.98 ; v1(53.11,7.84) 53.98,7.84 ; v1(53.11,7.84) 53.11,8.71 ; 38.2,2.82 v1(38.86,2.16) ; v1(38.86,2.16) 39.52,2.82 ; v1(38.86,2.16) 38.2,1.5 ; v1(38.86,2.16) 39.52,1.5 ; J8.1 10.92,17.98 ; J8.1 10.92,15.54 ; J8.1 9.7,16.76 ; J8.1 12.14,16.76 ; 40.68,31.58 v1(41.34,32.25) ; v1(41.34,32.25) 40.68,32.91 ; v1(41.34,32.25) 42,32.91 ; 64.33,24.52 U9.11 ; U9.11 63.51,25.02 ; U9.11 64.33,25.51 ; U13.1 4.57,6.99 ; U13.1 4.57,1.4 ; U13.1 7.37,4.19 ; U13.1 1.78,4.19 ; 92.81,7.9 v1(93.47,7.24) ; v1(93.47,7.24) 94.13,6.58 ; v1(93.47,7.24) 94.13,7.9 ; v1(93.47,7.24) 92.81,6.58 ; v1(74.42,38.99) 75.08,38.33 ; v1(74.42,38.99) 75.08,39.65 ; v1(74.42,38.99) 73.76,38.33 ; v1(74.42,38.99) 73.76,39.65 ; 22.99,33.91 24.21,33.91 ; 22.99,33.91 21.77,33.91 ; 22.99,33.91 22.99,32.69 ; 22.99,33.91 22.99,35.13 ; v1(53.11,5.3) 53.11,6.17 ; v1(53.11,5.3) 53.11,4.44 ; v1(53.11,5.3) 52.25,5.3 ; v1(53.11,5.3) 53.98,5.3 ; v1(22.86,7.24) 23.52,7.9 ; v1(22.86,7.24) 22.2,7.9 ; v1(22.86,7.24) 22.2,6.58 ; v1(22.86,7.24) 23.52,6.58 ; v1(45.52,5.29) 45.52,6.15 ; v1(45.52,5.29) 46.38,5.29 ; v1(45.52,5.29) 44.66,5.29 ; v1(45.52,5.29) 45.52,4.42 ; 77.01,26.92 J13.2 79.45,26.92 ; 77.01,14.22 J18.2 79.45,14.22 ; 74.24,5.21 v1(75.1,5.21) ; v1(75.1,5.21) 75.97,5.21 ; v1(75.1,5.21) 75.1,6.07 ; v1(75.1,5.21) 75.1,4.34 ; v1(43.94,2.16) 44.6,1.5 ; v1(43.94,2.16) 43.28,2.82 ; v1(43.94,2.16) 44.6,2.82 ; v1(43.94,2.16) 43.28,1.5 ; 49.68,19.43 v1(50.55,19.43) ; v1(50.55,19.43) 51.41,19.43 ; v1(50.55,19.43) 50.55,20.3 ; v1(50.55,19.43) 50.55,18.57 ; v1(46.61,14.35) 47.27,13.69 ; v1(46.61,14.35) 45.95,15.01 ; v1(46.61,14.35) 45.95,13.69 ; v1(41.02,13.97) 41.02,14.83 ; v1(41.02,13.97) 41.02,13.11 ; v1(41.02,13.97) 41.89,13.97 ; v1(41.02,13.97) 40.16,13.97 ; v1(82.04,2.16) 82.7,1.5 ; v1(82.04,2.16) 81.38,1.5 ; v1(82.04,2.16) 82.7,2.82 ; v1(82.04,2.16) 81.38,2.82 ; 53.44,39.65 v1(54.1,38.99) ; v1(54.1,38.99) 54.76,39.65 ; v1(54.1,38.99) 53.44,38.33 ; v1(54.1,38.99) 54.76,38.33 ; 7.72,39.65 v1(8.38,38.99) ; v1(8.38,38.99) 9.04,39.65 ; v1(8.38,38.99) 7.72,38.33 ; v1(8.38,38.99) 9.04,38.33 ; 71.22,2.82 v1(71.88,2.16) ; v1(71.88,2.16) 72.54,1.5 ; v1(71.88,2.16) 71.22,1.5 ; v1(71.88,2.16) 72.54,2.82 ; v1(57.84,7.8) 57.84,8.66 ; v1(57.84,7.8) 58.7,7.8 ; v1(57.84,7.8) 56.97,7.8 ; v1(57.84,7.8) 57.84,6.94 ; v1(82.7,5.22) 82.7,6.09 ; v1(82.7,5.22) 83.56,5.22 ; v1(82.7,5.22) 81.83,5.22 ; v1(82.7,5.22) 82.7,4.36 ; J30.2 87.07,9.14 ; J30.2 84.63,9.14 ; J30.2 85.85,7.92 ; J30.2 85.85,10.36 ; v1(16,38.99) 16.66,39.65 ; v1(16,38.99) 15.34,38.33 ; v1(16,38.99) 15.34,39.65 ; v1(16,38.99) 16.66,38.33 ; v1(79.5,2.16) 80.16,2.82 ; v1(79.5,2.16) 78.84,2.82 ; v1(79.5,2.16) 78.84,1.5 ; v1(79.5,2.16) 80.16,1.5 ; 51.82,19.84 v1(51.82,20.7) ; v1(51.82,20.7) 51.82,21.57 ; v1(51.82,20.7) 50.95,20.7 ; v1(51.82,20.7) 52.68,20.7 ; 53.8,31 C23.1 54.29,31.5 ; U6.3 10.91,22.76 ; U6.3 10.91,20.39 ; U6.3 12.1,21.57 ; U6.3 9.73,21.57 ; 86.46,39.65 v1(87.12,38.99) ; v1(87.12,38.99) 87.78,39.65 ; v1(87.12,38.99) 87.78,38.33 ; v1(87.12,38.99) 86.46,38.33 ; 88.36,21.78 v1(89.02,22.44) ; v1(89.02,22.44) 89.68,23.1 ; v1(89.02,22.44) 88.36,23.1 ; v1(89.02,22.44) 89.68,21.78 ; v1(74.42,2.16) 75.08,2.82 ; v1(74.42,2.16) 73.76,1.5 ; v1(74.42,2.16) 75.08,1.5 ; v1(74.42,2.16) 73.76,2.82 ; v1(56.64,2.16) 57.3,1.5 ; v1(56.64,2.16) 55.98,2.82 ; v1(56.64,2.16) 55.98,1.5 ; v1(56.64,2.16) 57.3,2.82 ; v1(55.29,5.21) 55.29,6.07 ; v1(55.29,5.21) 55.29,4.34 ; v1(55.29,5.21) 54.43,5.21 ; v1(55.29,5.21) 56.16,5.21 ; 35.66,39.65 v1(36.32,38.99) ; v1(36.32,38.99) 35.66,38.33 ; v1(36.32,38.99) 36.98,38.33 ; v1(36.32,38.99) 36.98,39.65 ; 77.01,32 J11.2 79.45,32 ; 77.01,9.14 J20.2 ; J20.2 79.45,9.14 ; J20.2 78.23,7.92 ; 66.14,38.33 v1(66.8,38.99) ; v1(66.8,38.99) 67.46,38.33 ; v1(66.8,38.99) 66.14,39.65 ; v1(66.8,38.99) 67.46,39.65 ; 12.44,11.53 v1(13.11,10.87) 13.77,10.21 ; v1(2.03,25.02) 2.69,25.68 ; v1(2.03,25.02) 1.37,25.68 ; v1(2.03,25.02) 2.69,24.36 ; v1(2.03,25.02) 1.37,24.36 ; v1(29.72,10.03) 30.38,9.37 ; v1(29.72,10.03) 30.38,10.69 ; v1(29.72,10.03) 29.06,10.69 ; v1(29.72,10.03) 29.06,9.37 ; 71.22,39.65 v1(71.88,38.99) ; v1(71.88,38.99) 72.54,39.65 ; v1(71.88,38.99) 72.54,38.33 ; v1(71.88,38.99) 71.22,38.33 ; v1(33.78,38.99) 34.44,39.65 ; v1(33.78,38.99) 34.44,38.33 ; v1(33.78,38.99) 33.12,39.65 ; v1(33.78,38.99) 33.12,38.33 ; 56.08,37.87 v1(56.74,37.21) ; v1(56.74,37.21) 57.4,36.55 ; v1(56.74,37.21) 57.4,37.87 ; v1(56.74,37.21) 56.08,36.55 ; U9.1 59.12,31.86 ; U9.1 59.12,30.87 ; U9.1 59.93,31.37 ; 61.06,1.5 v1(61.72,2.16) ; v1(61.72,2.16) 62.38,2.82 ; v1(61.72,2.16) 62.38,1.5 ; v1(61.72,2.16) 61.06,2.82 ; 90.77,23.1 v1(91.43,22.44) ; v1(91.43,22.44) 90.77,21.78 ; v1(91.43,22.44) 92.09,23.1 ; v1(91.43,22.44) 92.09,21.78 ; 31.9,15.82 R9.1 ; R9.1 32.39,16.32 ; U11.1 4.57,39.75 ; U11.1 7.37,36.96 ; U11.1 1.78,36.96 ; U11.1 4.57,34.16 ; C6.1 32.28,17.74 ; C6.1 32.28,16.75 ; 77.01,16.76 J17.2 79.45,16.76 ; 63.51,13.59 U10.12 ; U10.12 64.33,13.09 ; U10.12 64.33,14.08 ; U10.12 65.14,13.59 ; 41.34,29.6 U2.4 40.53,30.1
  TOP w0.381: C4.1 v1(44.45,25.15) ; v1(24.38,29.34) 23.6,29.34 C22.2 ; C3.2 v1(53.34,21.97) ; C24.2 v1(20.65,13.74) ; v1(13.11,10.87) 13.11,10.12 13.45,9.78 R30.1 ; C8.1 v1(38.35,22.99) ; v1(41.34,32.25) v1(41.34,30.92) U2.4 ; C5.2 v1(46.61,14.35) ; R31.1 v1(16.74,5.94) ; C1.2 v1(32.36,19.69) ; C9.1 13.89,11.68 13.11,12.47 v1(13.11,12.67) ; C23.1 v1(53.8,32.64) ; C2.1 44.4,22.15 44.4,22.81 v1(44.33,22.81) ; R4.1 v1(50.93,31.37) ; v1(39.62,24.51) 40.39,23.75 R20.1 ; U7.2 v1(16.64,10.41)
  GND w0.254: v1(91.43,22.44) 92.09,21.78 ; v1(91.43,22.44) 92.09,23.1 ; v1(91.43,22.44) 90.77,21.78 ; v1(91.43,22.44) 90.77,23.1 ; v1(46.61,14.35) 47.27,13.69 ; v1(46.61,14.35) 45.95,13.69 ; v1(46.61,14.35) 45.95,15.01 ; v1(46.61,14.35) 47.27,15.01 ; v1(40.44,5.29) 41.3,5.29 ; v1(40.44,5.29) 40.44,6.15 ; v1(40.44,5.29) 39.58,5.29 ; v1(40.44,5.29) 40.44,4.42 ; 66.14,39.65 v1(66.8,38.99) ; v1(66.8,38.99) 67.46,38.33 ; v1(66.8,38.99) 66.14,38.33 ; v1(66.8,38.99) 67.46,39.65 ; v1(22.86,10.03) 23.52,10.69 ; v1(22.86,10.03) 22.2,9.37 ; v1(22.86,10.03) 23.52,9.37 ; v1(22.86,10.03) 22.2,10.69 ; v1(93.47,7.24) 94.13,7.9 ; v1(93.47,7.24) 92.81,7.9 ; v1(93.47,7.24) 94.13,6.58 ; v1(93.47,7.24) 92.81,6.58 ; 55.98,2.82 v1(56.64,2.16) ; v1(56.64,2.16) 57.3,1.5 ; v1(56.64,2.16) 57.3,2.82 ; v1(56.64,2.16) 55.98,1.5 ; v1(62.92,7.8) 62.92,8.66 ; v1(62.92,7.8) 63.78,7.8 ; v1(62.92,7.8) 62.05,7.8 ; v1(62.92,7.8) 62.92,6.94 ; 12.44,10.21 v1(13.11,10.87) ; v1(13.11,10.87) 13.77,10.21 ; v1(13.11,10.87) 13.77,11.53 ; v1(13.11,10.87) 12.44,11.53 ; v1(50.93,31.37) 51.59,32.03 ; v1(50.93,31.37) 50.27,30.71 ; v1(50.93,31.37) 50.27,32.03 ; v1(50.93,31.37) 51.59,30.71 ; v1(71.88,2.16) 72.54,1.5 ; v1(71.88,2.16) 71.22,1.5 ; v1(71.88,2.16) 71.22,2.82 ; v1(71.88,2.16) 72.54,2.82 ; 88.36,25.64 v1(89.02,24.98) ; v1(89.02,24.98) 89.68,24.32 ; v1(89.02,24.98) 89.68,25.64 ; v1(89.02,24.98) 88.36,24.32 ; 53.09,13.99 v1(53.09,14.86) ; v1(53.09,14.86) 53.95,14.86 ; v1(53.09,14.86) 52.22,14.86 ; v1(53.09,14.86) 53.09,15.72 ; 43.79,24.48 v1(44.45,25.15) ; v1(44.45,25.15) 43.79,25.81 ; v1(44.45,25.15) 45.11,24.48 ; v1(44.45,25.15) 45.11,25.81 ; v1(16,38.99) 16.66,38.33 ; v1(16,38.99) 15.34,38.33 ; v1(16,38.99) 15.34,39.65 ; v1(16,38.99) 16.66,39.65 ; v1(53.8,32.64) 54.46,31.98 ; v1(53.8,32.64) 53.14,33.3 ; v1(53.8,32.64) 54.46,33.3 ; v1(53.8,32.64) 53.14,31.98 ; v1(16.74,5.94) 17.4,5.28 ; v1(16.74,5.94) 16.08,6.61 ; v1(16.74,5.94) 16.08,5.28 ; v1(16.74,5.94) 17.4,6.61 ; 22.2,6.58 v1(22.86,7.24) ; v1(22.86,7.24) 23.52,6.58 ; v1(22.86,7.24) 22.2,7.9 ; v1(22.86,7.24) 23.52,7.9 ; 33.12,1.5 v1(33.78,2.16) ; v1(33.78,2.16) 33.12,2.82 ; v1(33.78,2.16) 34.44,2.82 ; v1(33.78,2.16) 34.44,1.5 ; 48.36,2.82 v1(49.02,2.16) ; v1(49.02,2.16) 48.36,1.5 ; v1(49.02,2.16) 49.68,1.5 ; v1(49.02,2.16) 49.68,2.82 ; 50.57,4.44 v1(50.57,5.3) ; v1(50.57,5.3) 50.57,6.17 ; v1(50.57,5.3) 49.71,5.3 ; v1(50.57,5.3) 51.44,5.3 ; 63.7,34.77 v1(64.36,35.43) ; v1(64.36,35.43) 65.02,36.1 ; v1(64.36,35.43) 63.7,36.1 ; v1(64.36,35.43) 65.02,34.77 ; 49.7,12.99 v1(50.56,12.99) ; v1(50.56,12.99) 50.56,13.86 ; v1(50.56,12.99) 51.43,12.99 ; v1(50.56,12.99) 50.56,12.13 ; v1(69.34,38.99) 70,38.33 ; v1(69.34,38.99) 68.68,38.33 ; v1(69.34,38.99) 68.68,39.65 ; v1(69.34,38.99) 70,39.65 ; 92.81,16.74 v1(93.47,17.4) ; v1(93.47,17.4) 94.13,18.06 ; v1(93.47,17.4) 92.81,18.06 ; v1(93.47,17.4) 94.13,16.74 ; 1.37,21.82 v1(2.03,22.48) ; v1(2.03,22.48) 1.37,23.14 ; v1(2.03,22.48) 2.69,21.82 ; v1(2.03,22.48) 2.69,23.14 ; 55.98,38.33 v1(56.64,38.99) ; v1(56.64,38.99) 57.3,38.33 ; v1(56.64,38.99) 57.3,39.65 ; v1(56.64,38.99) 55.98,39.65 ; U3.1 9.55,7.01 ; U3.1 8.36,5.82 ; U3.1 7.16,7.01 ; U3.1 8.36,8.2 ; v1(91.43,17.36) 92.09,16.7 ; v1(91.43,17.36) 92.09,18.02 ; v1(91.43,17.36) 90.77,18.02 ; v1(91.43,17.36) 90.77,16.7 ; J16.2 79.36,19.3 ; J16.2 77.1,19.3 ; J16.2 78.23,18.17 ; J16.2 78.23,20.43 ; v1(2.03,7.24) 2.69,6.58 ; v1(2.03,7.24) 2.69,7.9 ; v1(2.03,7.24) 1.37,7.9 ; v1(2.03,7.24) 1.37,6.58 ; v1(48.03,7.84) 48.03,8.71 ; v1(48.03,7.84) 48.03,6.98 ; v1(48.03,7.84) 48.9,7.84 ; v1(48.03,7.84) 47.17,7.84 ; 35.66,1.5 v1(36.32,2.16) ; v1(36.32,2.16) 35.66,2.82 ; v1(36.32,2.16) 36.98,1.5 ; v1(36.32,2.16) 36.98,2.82 ; v1(54.1,2.16) 54.76,1.5 ; v1(54.1,2.16) 53.44,1.5 ; v1(54.1,2.16) 54.76,2.82 ; v1(54.1,2.16) 53.44,2.82 ; v1(34.67,27.94) 35.54,27.94 ; v1(34.67,27.94) 34.67,27.08 ; v1(34.67,27.94) 34.67,28.8 ; v1(34.67,27.94) 33.81,27.94 ; v1(18.54,38.99) 19.2,39.65 ; v1(18.54,38.99) 17.88,38.33 ; v1(18.54,38.99) 17.88,39.65 ; v1(18.54,38.99) 19.2,38.33 ; 37.85,30.38 v1(37.85,31.24) ; v1(37.85,31.24) 38.71,31.24 ; v1(37.85,31.24) 36.98,31.24 ; v1(37.85,31.24) 37.85,32.11 ; 77.1,14.22 J18.2 ; J18.2 78.23,13.09 ; J18.2 78.23,15.35 ; J18.2 79.36,14.22 ; 25.5,2.82 v1(26.16,2.16) ; v1(26.16,2.16) 26.82,2.82 ; v1(26.16,2.16) 25.5,1.5 ; v1(26.16,2.16) 26.82,1.5 ; J10.1 8.38,11.54 ; J10.1 7.25,10.41 ; J10.1 9.51,10.41 ; J10.1 8.38,9.28 ; 92.81,12.98 v1(93.47,12.32) ; v1(93.47,12.32) 94.13,12.98 ; v1(93.47,12.32) 94.13,11.66 ; v1(93.47,12.32) 92.81,11.66 ; v1(60.37,5.21) 61.24,5.21 ; v1(60.37,5.21) 59.51,5.21 ; v1(60.37,5.21) 60.37,4.34 ; v1(60.37,5.21) 60.37,6.07 ; 66.24,34.77 v1(66.9,35.43) ; v1(66.9,35.43) 67.56,36.1 ; v1(66.9,35.43) 66.24,36.1 ; v1(66.9,35.43) 67.56,34.77 ; 56.97,5.21 v1(57.83,5.21) ; v1(57.83,5.21) 58.7,5.21 ; v1(57.83,5.21) 57.83,6.07 ; v1(57.83,5.21) 57.83,4.34 ; v1(77.62,5.22) 77.62,6.09 ; v1(77.62,5.22) 77.62,4.36 ; v1(77.62,5.22) 76.75,5.22 ; v1(77.62,5.22) 78.48,5.22 ; 7.72,2.82 v1(8.38,2.16) ; v1(8.38,2.16) 9.04,1.5 ; v1(8.38,2.16) 9.04,2.82 ; v1(8.38,2.16) 7.72,1.5 ; 1.37,26.9 v1(2.03,27.56) ; v1(2.03,27.56) 2.69,28.22 ; v1(2.03,27.56) 2.69,26.9 ; v1(2.03,27.56) 1.37,28.22 ; 29.06,6.58 v1(29.72,7.24) ; v1(29.72,7.24) 29.06,7.9 ; v1(29.72,7.24) 30.38,6.58 ; v1(29.72,7.24) 30.38,7.9 ; v1(48.03,10.38) 48.03,11.25 ; v1(48.03,10.38) 47.17,10.38 ; v1(48.03,10.38) 48.03,9.52 ; v1(48.03,10.38) 48.9,10.38 ; 68.78,36.55 v1(69.44,37.21) ; v1(69.44,37.21) 70.1,37.87 ; v1(69.44,37.21) 70.1,36.55 ; v1(69.44,37.21) 68.78,37.87 ; v1(2.03,14.86) 2.69,15.52 ; v1(2.03,14.86) 2.69,14.2 ; v1(2.03,14.86) 1.37,15.52 ; v1(2.03,14.86) 1.37,14.2 ; v1(61.72,38.99) 62.38,39.65 ; v1(61.72,38.99) 61.06,38.33 ; v1(61.72,38.99) 61.06,39.65 ; v1(61.72,38.99) 62.38,38.33 ; 74.24,5.21 v1(75.1,5.21) ; v1(75.1,5.21) 75.97,5.21 ; v1(75.1,5.21) 75.1,6.07 ; v1(75.1,5.21) 75.1,4.34 ; v1(49.02,38.99) 49.68,39.65 ; v1(49.02,38.99) 48.36,39.65 ; v1(49.02,38.99) 49.68,38.33 ; v1(49.02,38.99) 48.36,38.33 ; 55.29,4.34 v1(55.29,5.21) ; v1(55.29,5.21) 54.43,5.21 ; v1(55.29,5.21) 55.29,6.07 ; v1(55.29,5.21) 56.16,5.21 ; 40.68,30.26 v1(41.34,30.92) ; v1(41.34,30.92) 40.68,31.59 ; v1(41.34,30.92) 42,30.26 ; v1(41.34,30.92) 42,31.59 ; 88.36,16.7 v1(89.02,17.36) ; v1(89.02,17.36) 89.68,18.02 ; v1(89.02,17.36) 89.68,16.7 ; v1(89.02,17.36) 88.36,18.02 ; U15.1 90.93,39.75 ; U15.1 90.93,34.16 ; U15.1 88.14,36.96 ; U15.1 93.73,36.96 ; 49.68,19.43 v1(50.55,19.43) ; v1(50.55,19.43) 50.55,18.57 ; v1(50.55,19.43) 50.55,20.3 ; v1(50.55,19.43) 51.41,19.43 ; v1(29.72,10.03) 30.38,9.37 ; v1(29.72,10.03) 29.06,9.37 ; v1(29.72,10.03) 29.06,10.69 ; v1(29.72,10.03) 30.38,10.69 ; v1(45.52,5.29) 46.38,5.29 ; v1(45.52,5.29) 45.52,6.15 ; v1(45.52,5.29) 44.66,5.29 ; v1(45.52,5.29) 45.52,4.42 ; R26.1 29.24,32.54 ; R26.1 30.43,31.34 ; R26.1 29.24,30.15 ; R26.1 28.04,31.34 ; 4.57,1.4 U13.1 ; U13.1 7.37,4.19 ; U13.1 1.78,4.19 ; U13.1 4.57,6.99 ; v1(69.44,35.43) 70.1,34.77 ; v1(69.44,35.43) 68.78,36.1 ; v1(69.44,35.43) 70.1,36.1 ; v1(69.44,35.43) 68.78,34.77 ; 56.08,36.55 v1(56.74,37.21) ; v1(56.74,37.21) 57.4,37.87 ; v1(56.74,37.21) 56.08,37.87 ; v1(56.74,37.21) 57.4,36.55 ; 28.04,39.65 v1(28.7,38.99) ; v1(28.7,38.99) 29.36,39.65 ; v1(28.7,38.99) 28.04,38.33 ; v1(28.7,38.99) 29.36,38.33 ; 71.22,38.33 v1(71.88,38.99) ; v1(71.88,38.99) 71.22,39.65 ; v1(71.88,38.99) 72.54,39.65 ; v1(71.88,38.99) 72.54,38.33 ; v1(2.03,19.94) 2.69,20.6 ; v1(2.03,19.94) 1.37,19.28 ; v1(2.03,19.94) 1.37,20.6 ; v1(2.03,19.94) 2.69,19.28 ; 30.58,38.33 v1(31.24,38.99) ; v1(31.24,38.99) 31.9,38.33 ; v1(31.24,38.99) 30.58,39.65 ; v1(31.24,38.99) 31.9,39.65 ; v1(74.42,2.16) 75.08,2.82 ; v1(74.42,2.16) 73.76,1.5 ; v1(74.42,2.16) 73.76,2.82 ; v1(74.42,2.16) 75.08,1.5 ; 83.92,38.33 v1(84.58,38.99) ; v1(84.58,38.99) 85.24,38.33 ; v1(84.58,38.99) 85.24,39.65 ; v1(84.58,38.99) 83.92,39.65 ; 81.38,39.65 v1(82.04,38.99) ; v1(82.04,38.99) 82.7,39.65 ; v1(82.04,38.99) 81.38,38.33 ; v1(82.04,38.99) 82.7,38.33 ; 86.46,1.5 v1(87.12,2.16) ; v1(87.12,2.16) 87.78,1.5 ; v1(87.12,2.16) 86.46,2.82 ; v1(87.12,2.16) 87.78,2.82 ; 9.73,21.57 U6.3 ; U6.3 10.91,22.76 ; U6.3 10.91,20.39 ; U6.3 12.1,21.57 ; v1(31.7,14.4) 32.36,15.06 ; v1(31.7,14.4) 31.04,13.74 ; v1(31.7,14.4) 31.04,15.06 ; v1(31.7,14.4) 32.36,13.74 ; v1(70.02,5.21) 70.89,5.21 ; v1(70.02,5.21) 70.02,4.34 ; v1(70.02,5.21) 69.16,5.21 ; v1(70.02,5.21) 70.02,6.07 ; 85.85,25.79 J23.2 ; J23.2 85.85,28.05 ; J23.2 86.98,26.92 ; J23.2 84.72,26.92 ; J28.2 85.85,15.35 ; J28.2 84.72,14.22 ; J28.2 85.85,13.09 ; J28.2 86.98,14.22 ; 90.77,25.64 v1(91.43,24.98) ; v1(91.43,24.98) 92.09,24.32 ; v1(91.43,24.98) 92.09,25.64 ; v1(91.43,24.98) 90.77,24.32 ; 47.17,5.3 v1(48.03,5.3) ; v1(48.03,5.3) 48.03,4.44 ; v1(48.03,5.3) 48.9,5.3 ; v1(48.03,5.3) 48.03,6.17 ; 61.16,36.1 v1(61.82,35.43) ; v1(61.82,35.43) 62.48,36.1 ; v1(61.82,35.43) 61.16,34.77 ; v1(61.82,35.43) 62.48,34.77 ; v1(13.46,2.16) 14.12,2.82 ; v1(13.46,2.16) 12.8,1.5 ; v1(13.46,2.16) 14.12,1.5 ; v1(13.46,2.16) 12.8,2.82 ; v1(35.18,31.24) 36.04,31.24 ; v1(35.18,31.24) 34.31,31.24 ; v1(35.18,31.24) 35.18,30.38 ; v1(35.18,31.24) 35.18,32.11 ; 85.85,28.33 J22.2 ; J22.2 85.85,30.59 ; J22.2 86.98,29.46 ; J22.2 84.72,29.46 ; 38.96,23.85 v1(39.62,24.51) ; v1(39.62,24.51) 40.29,23.85 ; v1(39.62,24.51) 38.96,25.17 ; v1(39.62,24.51) 40.29,25.17 ; 41.02,13.11 v1(41.02,13.97) ; v1(41.02,13.97) 41.02,14.83 ; v1(41.02,13.97) 40.16,13.97 ; v1(41.02,13.97) 41.89,13.97 ; v1(62.88,5.22) 62.88,6.09 ; v1(62.88,5.22) 63.75,5.22 ; v1(62.88,5.22) 62.88,4.36 ; v1(62.88,5.22) 62.02,5.22 ; J1.1 52.69,33.91 ; J1.1 51.56,32.78 ; J1.1 50.43,33.91 ; J1.1 51.56,35.04 ; 88.36,14.16 v1(89.02,14.82) ; v1(89.02,14.82) 89.68,15.48 ; v1(89.02,14.82) 88.36,15.48 ; v1(89.02,14.82) 89.68,14.16 ; v1(61.82,37.21) 62.48,37.87 ; v1(61.82,37.21) 61.16,36.55 ; v1(61.82,37.21) 61.16,37.87 ; v1(61.82,37.21) 62.48,36.55 ; J19.2 78.23,12.81 ; J19.2 79.36,11.68 ; J19.2 78.23,10.55 ; J19.2 77.1,11.68 ; v1(76.96,2.16) 77.62,2.82 ; v1(76.96,2.16) 77.62,1.5 ; v1(76.96,2.16) 76.3,1.5 ; v1(76.96,2.16) 76.3,2.82 ; 49.71,7.84 v1(50.57,7.84) ; v1(50.57,7.84) 50.57,8.71 ; v1(50.57,7.84) 51.44,7.84 ; v1(50.57,7.84) 50.57,6.98 ; v1(93.47,27.56) 94.13,26.9 ; v1(93.47,27.56) 92.81,26.9 ; v1(93.47,27.56) 92.81,28.22 ; v1(93.47,27.56) 94.13,28.22 ; 7.72,39.65 v1(8.38,38.99) ; v1(8.38,38.99) 9.04,39.65 ; v1(8.38,38.99) 7.72,38.33 ; v1(8.38,38.99) 9.04,38.33 ; 25.5,38.33 v1(26.16,38.99) ; v1(26.16,38.99) 26.82,38.33 ; v1(26.16,38.99) 26.82,39.65 ; v1(26.16,38.99) 25.5,39.65 ; 77.1,29.46 J12.2 ; J12.2 79.36,29.46 ; J12.2 78.23,28.33 ; J12.2 78.23,30.59 ; v1(93.47,14.86) 94.13,14.2 ; v1(93.47,14.86) 92.81,14.2 ; v1(93.47,14.86) 94.13,15.52 ; v1(93.47,14.86) 92.81,15.52 ; 84.72,9.14 J30.2 ; J30.2 86.98,9.14 ; J30.2 85.85,8.01 ; J30.2 85.85,10.27 ; 38.2,2.82 v1(38.86,2.16) ; v1(38.86,2.16) 39.52,2.82 ; v1(38.86,2.16) 38.2,1.5 ; v1(38.86,2.16) 39.52,1.5 ; 53.44,38.33 v1(54.1,38.99) ; v1(54.1,38.99) 53.44,39.65 ; v1(54.1,38.99) 54.76,38.33 ; v1(54.1,38.99) 54.76,39.65 ; v1(15.37,19.56) 15.37,20.42 ; v1(15.37,19.56) 14.5,19.56 ; v1(15.37,19.56) 15.37,18.69 ; v1(15.37,19.56) 16.23,19.56 ; v1(57.84,7.8) 58.7,7.8 ; v1(57.84,7.8) 57.84,6.94 ; v1(57.84,7.8) 57.84,8.66 ; v1(57.84,7.8) 56.97,7.8 ; 85.85,23.25 J24.2 ; J24.2 86.98,24.38 ; J24.2 84.72,24.38 ; J24.2 85.85,25.51 ; v1(43.94,2.16) 44.6,2.82 ; v1(43.94,2.16) 44.6,1.5 ; v1(43.94,2.16) 43.28,2.82 ; v1(43.94,2.16) 43.28,1.5 ; 92.81,29.44 v1(93.47,30.1) ; v1(93.47,30.1) 94.13,29.44 ; v1(93.47,30.1) 94.13,30.76 ; v1(93.47,30.1) 92.81,30.76 ; 15.34,1.5 v1(16,2.16) ; v1(16,2.16) 16.66,1.5 ; v1(16,2.16) 15.34,2.82 ; v1(16,2.16) 16.66,2.82 ; 66.24,36.55 v1(66.9,37.21) ; v1(66.9,37.21) 67.56,37.87 ; v1(66.9,37.21) 66.24,37.87 ; v1(66.9,37.21) 67.56,36.55 ; v1(82.04,2.16) 82.7,1.5 ; v1(82.04,2.16) 81.38,2.82 ; v1(82.04,2.16) 82.7,2.82 ; v1(82.04,2.16) 81.38,1.5 ; 48.41,20.7 v1(49.28,20.7) ; v1(49.28,20.7) 49.28,21.57 ; v1(49.28,20.7) 49.28,19.84 ; v1(49.28,20.7) 50.14,20.7 ; v1(23.62,38.99) 24.28,38.33 ; v1(23.62,38.99) 24.28,39.65 ; v1(23.62,38.99) 22.96,38.33 ; v1(23.62,38.99) 22.96,39.65 ; 58.62,36.55 v1(59.28,37.21) ; v1(59.28,37.21) 59.94,37.87 ; v1(59.28,37.21) 59.94,36.55 ; v1(59.28,37.21) 58.62,37.87 ; v1(55.37,31.37) 55.37,32.23 ; v1(55.37,31.37) 55.37,30.5 ; v1(55.37,31.37) 54.51,31.37 ; v1(55.37,31.37) 56.24,31.37 ; 56.08,36.1 v1(56.74,35.43) ; v1(56.74,35.43) 57.4,36.1 ; v1(56.74,35.43) 56.08,34.77 ; v1(56.74,35.43) 57.4,34.77 ; v1(89.02,22.44) 89.68,21.78 ; v1(89.02,22.44) 88.36,23.1 ; v1(89.02,22.44) 89.68,23.1 ; v1(89.02,22.44) 88.36,21.78 ; 3.85,19.31 v1(4.51,19.97) ; v1(4.51,19.97) 3.85,20.63 ; v1(4.51,19.97) 5.17,19.31 ; v1(4.51,19.97) 5.17,20.63 ; 4.57,34.16 U11.1 ; U11.1 1.78,36.96 ; U11.1 7.37,36.96 ; U11.1 4.57,39.75 ; 26.34,22.19 Q1.2 ; Q1.2 27.6,23.44 ; Q1.2 26.34,24.7 ; Q1.2 25.08,23.44 ; 67.1,5.22 v1(67.96,5.22) ; v1(67.96,5.22) 68.83,5.22 ; v1(67.96,5.22) 67.96,4.36 ; v1(67.96,5.22) 67.96,6.09 ; 1.37,18.06 v1(2.03,17.4) ; v1(2.03,17.4) 1.37,16.74 ; v1(2.03,17.4) 2.69,16.74 ; v1(2.03,17.4) 2.69,18.06 ; 22.99,33.91 22.99,35.04 ; 22.99,33.91 22.99,32.78 ; 22.99,33.91 21.86,33.91 ; 22.99,33.91 24.12,33.91 ; 78.23,20.71 J15.2 ; J15.2 79.36,21.84 ; J15.2 78.23,22.97 ; J15.2 77.1,21.84 ; J25.2 86.98,21.84 ; J25.2 85.85,20.71 ; J25.2 84.72,21.84 ; J25.2 85.85,22.97 ; v1(53.11,10.38) 53.98,10.38 ; v1(53.11,10.38) 52.25,10.38 ; v1(53.11,10.38) 53.11,11.25 ; v1(53.11,10.38) 53.11,9.52 ; v1(46.48,2.16) 47.14,1.5 ; v1(46.48,2.16) 47.14,2.82 ; v1(46.48,2.16) 45.82,1.5 ; v1(46.48,2.16) 45.82,2.82 ; v1(91.43,19.9) 92.09,19.24 ; v1(91.43,19.9) 90.77,20.56 ; v1(91.43,19.9) 92.09,20.56 ; v1(91.43,19.9) 90.77,19.24 ; v1(23.62,2.16) 24.28,1.5 ; v1(23.62,2.16) 22.96,2.82 ; v1(23.62,2.16) 24.28,2.82 ; v1(23.62,2.16) 22.96,1.5 ; 77.1,16.76 J17.2 ; J17.2 79.36,16.76 ; J17.2 78.23,15.63 ; J17.2 78.23,17.89 ; 80.16,4.36 v1(80.16,5.22) ; v1(80.16,5.22) 79.29,5.22 ; v1(80.16,5.22) 81.02,5.22 ; v1(80.16,5.22) 80.16,6.09 ; v1(76.96,38.99) 77.62,38.33 ; v1(76.96,38.99) 76.3,39.65 ; v1(76.96,38.99) 77.62,39.65 ; v1(76.96,38.99) 76.3,38.33 ; v1(64.36,37.21) 65.02,36.55 ; v1(64.36,37.21) 65.02,37.87 ; v1(64.36,37.21) 63.7,36.55 ; v1(64.36,37.21) 63.7,37.87 ; v1(59.28,35.43) 59.94,34.77 ; v1(59.28,35.43) 58.62,36.1 ; v1(59.28,35.43) 59.94,36.1 ; v1(59.28,35.43) 58.62,34.77 ; v1(38.35,22.99) 39.02,22.33 ; v1(38.35,22.99) 39.02,23.65 ; v1(38.35,22.99) 37.69,22.33 ; v1(38.35,22.99) 37.69,23.65 ; v1(61.72,2.16) 62.38,2.82 ; v1(61.72,2.16) 61.06,1.5 ; v1(61.72,2.16) 62.38,1.5 ; v1(61.72,2.16) 61.06,2.82 ; 58.52,38.33 v1(59.18,38.99) ; v1(59.18,38.99) 59.84,38.33 ; v1(59.18,38.99) 59.84,39.65 ; v1(59.18,38.99) 58.52,39.65 ; 86.46,39.65 v1(87.12,38.99) ; v1(87.12,38.99) 86.46,38.33 ; v1(87.12,38.99) 87.78,39.65 ; v1(87.12,38.99) 87.78,38.33 ; v1(79.5,2.16) 80.16,1.5 ; v1(79.5,2.16) 78.84,1.5 ; v1(79.5,2.16) 78.84,2.82 ; v1(79.5,2.16) 80.16,2.82 ; 33.12,39.65 v1(33.78,38.99) ; v1(33.78,38.99) 34.44,38.33 ; v1(33.78,38.99) 33.12,38.33 ; v1(33.78,38.99) 34.44,39.65 ; v1(18.54,2.16) 19.2,2.82 ; v1(18.54,2.16) 17.88,1.5 ; v1(18.54,2.16) 17.88,2.82 ; v1(18.54,2.16) 19.2,1.5 ; v1(72.56,5.21) 72.56,6.07 ; v1(72.56,5.21) 73.43,5.21 ; v1(72.56,5.21) 72.56,4.34 ; v1(72.56,5.21) 71.7,5.21 ; v1(4.51,22.51) 5.17,23.17 ; v1(4.51,22.51) 3.85,23.17 ; v1(4.51,22.51) 5.17,21.85 ; v1(4.51,22.51) 3.85,21.85 ; 40.74,39.65 v1(41.4,38.99) ; v1(41.4,38.99) 42.06,39.65 ; v1(41.4,38.99) 42.06,38.33 ; v1(41.4,38.99) 40.74,38.33 ; 84.72,16.76 J27.2 ; J27.2 86.98,16.76 ; J27.2 85.85,15.63 ; J27.2 85.85,17.89 ; v1(50.55,21.97) 50.55,22.84 ; v1(50.55,21.97) 51.41,21.97 ; v1(50.55,21.97) 50.55,21.11 ; v1(50.55,21.97) 49.68,21.97 ; 1.37,33.3 v1(2.03,32.64) ; v1(2.03,32.64) 1.37,31.98 ; v1(2.03,32.64) 2.69,31.98 ; v1(2.03,32.64) 2.69,33.3 ; J21.2 85.85,33.13 ; J21.2 86.98,32 ; J21.2 85.85,30.87 ; J21.2 84.72,32 ; v1(13.11,12.67) 13.77,13.34 ; v1(13.11,12.67) 12.44,12.01 ; v1(13.11,12.67) 13.77,12.01 ; v1(13.11,12.67) 12.44,13.34 ; v1(44.33,22.81) 44.99,23.47 ; v1(44.33,22.81) 44.99,22.15 ; v1(44.33,22.81) 43.67,23.47 ; v1(44.33,22.81) 43.67,22.15 ; v1(28.7,2.16) 29.36,2.82 ; v1(28.7,2.16) 28.04,2.82 ; v1(28.7,2.16) 28.04,1.5 ; v1(28.7,2.16) 29.36,1.5 ; J11.2 78.23,33.13 ; J11.2 78.23,30.87 ; J11.2 77.1,32 ; J11.2 79.36,32 ; v1(24.38,29.34) 25.05,28.68 ; v1(24.38,29.34) 23.72,30 ; v1(24.38,29.34) 23.72,28.68 ; v1(24.38,29.34) 25.05,30 ; v1(2.03,12.32) 2.69,11.66 ; v1(2.03,12.32) 1.37,11.66 ; v1(2.03,12.32) 2.69,12.98 ; v1(2.03,12.32) 1.37,12.98 ; v1(4.51,25.05) 5.17,25.71 ; v1(4.51,25.05) 3.85,24.39 ; v1(4.51,25.05) 5.17,24.39 ; v1(4.51,25.05) 3.85,25.71 ; 63.6,38.33 v1(64.26,38.99) ; v1(64.26,38.99) 63.6,39.65 ; v1(64.26,38.99) 64.92,39.65 ; v1(64.26,38.99) 64.92,38.33 ; v1(20.65,13.74) 21.31,14.4 ; v1(20.65,13.74) 21.31,13.08 ; v1(20.65,13.74) 19.99,13.08 ; v1(20.65,13.74) 19.99,14.4 ; v1(41.34,32.25) 42,32.91 ; v1(41.34,32.25) 40.68,31.58 ; v1(41.34,32.25) 42,31.58 ; v1(41.34,32.25) 40.68,32.91 ; 1.37,24.36 v1(2.03,25.02) ; v1(2.03,25.02) 2.69,24.36 ; v1(2.03,25.02) 1.37,25.68 ; v1(2.03,25.02) 2.69,25.68 ; 59.51,7.8 v1(60.38,7.8) ; v1(60.38,7.8) 60.38,6.94 ; v1(60.38,7.8) 60.38,8.66 ; v1(60.38,7.8) 61.24,7.8 ; 45.47,7.01 v1(45.47,7.87) ; v1(45.47,7.87) 46.33,7.87 ; v1(45.47,7.87) 45.47,8.74 ; v1(45.47,7.87) 44.6,7.87 ; U14.1 90.93,6.99 ; U14.1 88.14,4.19 ; U14.1 93.73,4.19 ; U14.1 90.93,1.4 ; U3.3 13.44,8.2 ; U3.3 12.24,7.01 ; U3.3 14.63,7.01 ; U3.3 13.44,5.82 ; v1(21.08,2.16) 21.74,2.82 ; v1(21.08,2.16) 20.42,1.5 ; v1(21.08,2.16) 21.74,1.5 ; v1(21.08,2.16) 20.42,2.82 ; 50.9,38.33 v1(51.56,38.99) ; v1(51.56,38.99) 52.22,39.65 ; v1(51.56,38.99) 50.9,39.65 ; v1(51.56,38.99) 52.22,38.33 ; v1(65.42,5.22) 65.42,6.09 ; v1(65.42,5.22) 65.42,4.36 ; v1(65.42,5.22) 66.29,5.22 ; v1(65.42,5.22) 64.56,5.22 ; 53.11,6.98 v1(53.11,7.84) ; v1(53.11,7.84) 52.25,7.84 ; v1(53.11,7.84) 53.98,7.84 ; v1(53.11,7.84) 53.11,8.71 ; J20.2 78.23,10.27 ; J20.2 77.1,9.14 ; J20.2 79.36,9.14 ; J20.2 78.23,8.01 ; 10.26,38.33 v1(10.92,38.99) ; v1(10.92,38.99) 11.58,38.33 ; v1(10.92,38.99) 11.58,39.65 ; v1(10.92,38.99) 10.26,39.65 ; 1.37,10.44 v1(2.03,9.78) ; v1(2.03,9.78) 1.37,9.12 ; v1(2.03,9.78) 2.69,9.12 ; v1(2.03,9.78) 2.69,10.44 ; v1(16.64,10.41) 17.3,9.75 ; v1(16.64,10.41) 15.98,9.75 ; v1(16.64,10.41) 15.98,11.08 ; v1(16.64,10.41) 17.3,11.08 ; 83.92,1.5 v1(84.58,2.16) ; v1(84.58,2.16) 85.24,1.5 ; v1(84.58,2.16) 83.92,2.82 ; v1(84.58,2.16) 85.24,2.82 ; v1(46.48,38.99) 47.14,38.33 ; v1(46.48,38.99) 47.14,39.65 ; v1(46.48,38.99) 45.82,38.33 ; v1(46.48,38.99) 45.82,39.65 ; v1(17.65,19.56) 17.65,20.42 ; v1(17.65,19.56) 17.65,18.69 ; v1(17.65,19.56) 16.79,19.56 ; v1(17.65,19.56) 18.52,19.56 ; v1(59.18,2.16) 59.84,2.82 ; v1(59.18,2.16) 58.52,1.5 ; v1(59.18,2.16) 59.84,1.5 ; v1(59.18,2.16) 58.52,2.82 ; 20.42,39.65 v1(21.08,38.99) ; v1(21.08,38.99) 21.74,39.65 ; v1(21.08,38.99) 21.74,38.33 ; v1(21.08,38.99) 20.42,38.33 ; 85.85,10.55 J29.2 ; J29.2 86.98,11.68 ; J29.2 85.85,12.81 ; J29.2 84.72,11.68 ; 52.24,12.99 v1(53.1,12.99) ; v1(53.1,12.99) 53.1,12.13 ; v1(53.1,12.99) 53.97,12.99 ; v1(53.1,12.99) 53.1,13.86 ; 1.37,29.44 v1(2.03,30.1) ; v1(2.03,30.1) 2.69,29.44 ; v1(2.03,30.1) 2.69,30.76 ; v1(2.03,30.1) 1.37,30.76 ; 78.23,23.25 J14.2 ; J14.2 77.1,24.38 ; J14.2 79.36,24.38 ; J14.2 78.23,25.51 ; 50.57,9.52 v1(50.57,10.38) ; v1(50.57,10.38) 51.44,10.38 ; v1(50.57,10.38) 50.57,11.25 ; v1(50.57,10.38) 49.71,10.38 ; v1(69.34,2.16) 70,2.82 ; v1(69.34,2.16) 70,1.5 ; v1(69.34,2.16) 68.68,1.5 ; v1(69.34,2.16) 68.68,2.82 ; v1(43.94,38.99) 44.6,39.65 ; v1(43.94,38.99) 43.28,38.33 ; v1(43.94,38.99) 43.28,39.65 ; v1(43.94,38.99) 44.6,38.33 ; 12.8,38.33 v1(13.46,38.99) ; v1(13.46,38.99) 14.12,38.33 ; v1(13.46,38.99) 14.12,39.65 ; v1(13.46,38.99) 12.8,39.65 ; 52.25,5.3 v1(53.11,5.3) ; v1(53.11,5.3) 53.11,6.17 ; v1(53.11,5.3) 53.98,5.3 ; v1(53.11,5.3) 53.11,4.44 ; v1(36.32,38.99) 36.98,38.33 ; v1(36.32,38.99) 36.98,39.65 ; v1(36.32,38.99) 35.66,39.65 ; v1(36.32,38.99) 35.66,38.33 ; 73.76,38.33 v1(74.42,38.99) ; v1(74.42,38.99) 75.08,38.33 ; v1(74.42,38.99) 75.08,39.65 ; v1(74.42,38.99) 73.76,39.65 ; 50.55,13.99 v1(50.55,14.86) ; v1(50.55,14.86) 49.68,14.86 ; v1(50.55,14.86) 50.55,15.72 ; v1(50.55,14.86) 51.41,14.86 ; 10.26,1.5 v1(10.92,2.16) ; v1(10.92,2.16) 11.58,1.5 ; v1(10.92,2.16) 10.26,2.82 ; v1(10.92,2.16) 11.58,2.82 ; 66.14,1.5 v1(66.8,2.16) ; v1(66.8,2.16) 67.46,1.5 ; v1(66.8,2.16) 67.46,2.82 ; v1(66.8,2.16) 66.14,2.82 ; J13.2 79.36,26.92 ; J13.2 78.23,25.79 ; J13.2 77.1,26.92 ; J13.2 78.23,28.05 ; 31.7,19.02 v1(32.36,19.69) ; v1(32.36,19.69) 31.7,20.35 ; v1(32.36,19.69) 33.02,19.02 ; v1(32.36,19.69) 33.02,20.35 ; 40.74,1.5 v1(41.4,2.16) ; v1(41.4,2.16) 42.06,2.82 ; v1(41.4,2.16) 42.06,1.5 ; v1(41.4,2.16) 40.74,2.82 ; v1(51.56,2.16) 52.22,1.5 ; v1(51.56,2.16) 50.9,2.82 ; v1(51.56,2.16) 52.22,2.82 ; v1(51.56,2.16) 50.9,1.5 ; 51.82,19.84 v1(51.82,20.7) ; v1(51.82,20.7) 50.95,20.7 ; v1(51.82,20.7) 52.68,20.7 ; v1(51.82,20.7) 51.82,21.57 ; v1(38.86,38.99) 39.52,39.65 ; v1(38.86,38.99) 38.2,39.65 ; v1(38.86,38.99) 39.52,38.33 ; v1(38.86,38.99) 38.2,38.33 ; 9.79,16.76 J8.1 ; J8.1 10.92,15.63 ; J8.1 12.05,16.76 ; J8.1 10.92,17.89 ; v1(82.7,5.22) 83.56,5.22 ; v1(82.7,5.22) 82.7,6.09 ; v1(82.7,5.22) 82.7,4.36 ; v1(82.7,5.22) 81.83,5.22 ; 48.42,29.53 v1(49.09,30.19) ; v1(49.09,30.19) 48.42,30.85 ; v1(49.09,30.19) 49.75,30.85 ; v1(49.09,30.19) 49.75,29.53 ; v1(93.47,32.64) 94.13,31.98 ; v1(93.47,32.64) 92.81,31.98 ; v1(93.47,32.64) 94.13,33.3 ; v1(93.47,32.64) 92.81,33.3 ; v1(93.47,25.02) 94.13,24.36 ; v1(93.47,25.02) 92.81,25.68 ; v1(93.47,25.02) 92.81,24.36 ; v1(93.47,25.02) 94.13,25.68 ; 63.6,2.82 v1(64.26,2.16) ; v1(64.26,2.16) 63.6,1.5 ; v1(64.26,2.16) 64.92,1.5 ; v1(64.26,2.16) 64.92,2.82 ; 88.36,19.24 v1(89.02,19.9) ; v1(89.02,19.9) 89.68,20.56 ; v1(89.02,19.9) 89.68,19.24 ; v1(89.02,19.9) 88.36,20.56 ; v1(31.24,2.16) 31.9,2.82 ; v1(31.24,2.16) 31.9,1.5 ; v1(31.24,2.16) 30.58,2.82 ; v1(31.24,2.16) 30.58,1.5 ; v1(42.98,5.29) 42.98,6.15 ; v1(42.98,5.29) 43.84,5.29 ; v1(42.98,5.29) 42.12,5.29 ; v1(42.98,5.29) 42.98,4.42 ; v1(91.43,14.82) 92.09,15.48 ; v1(91.43,14.82) 92.09,14.16 ; v1(91.43,14.82) 90.77,14.16 ; v1(91.43,14.82) 90.77,15.48 ; 92.81,10.44 v1(93.47,9.78) ; v1(93.47,9.78) 92.81,9.12 ; v1(93.47,9.78) 94.13,10.44 ; v1(93.47,9.78) 94.13,9.12 ; 47.15,30.85 v1(47.82,30.19) ; v1(47.82,30.19) 48.48,30.85 ; v1(47.82,30.19) 47.15,29.53 ; v1(47.82,30.19) 48.48,29.53 ; v1(93.47,22.48) 94.13,23.14 ; v1(93.47,22.48) 92.81,21.82 ; v1(93.47,22.48) 94.13,21.82 ; v1(93.47,22.48) 92.81,23.14 ; v1(93.47,19.94) 94.13,19.28 ; v1(93.47,19.94) 92.81,19.28 ; v1(93.47,19.94) 94.13,20.6 ; v1(93.47,19.94) 92.81,20.6 ; 85.85,18.17 J26.2 ; J26.2 86.98,19.3 ; J26.2 85.85,20.43 ; J26.2 84.72,19.3 ; 52.68,22.63 v1(53.34,21.97) ; v1(53.34,21.97) 52.68,21.31 ; v1(53.34,21.97) 54,22.63 ; v1(53.34,21.97) 54,21.31 ; v1(42.16,12.32) 43.03,12.32 ; v1(42.16,12.32) 42.16,11.45 ; v1(42.16,12.32) 41.3,12.32 ; v1(42.16,12.32) 42.16,13.18 ; 78.84,38.33 v1(79.5,38.99) ; v1(79.5,38.99) 78.84,39.65 ; v1(79.5,38.99) 80.16,39.65 ; v1(79.5,38.99) 80.16,38.33
  BOTTOM w0.254: v1(70.02,5.21) 70.02,6.07 ; v1(70.02,5.21) 70.89,5.21 ; v1(70.02,5.21) 70.02,4.34 ; v1(70.02,5.21) 69.16,5.21 ; v1(2.03,22.48) 2.69,21.82 ; v1(2.03,22.48) 1.37,21.82 ; v1(2.03,22.48) 1.37,23.14 ; v1(2.03,22.48) 2.69,23.14 ; 68.78,36.55 v1(69.44,37.21) ; v1(69.44,37.21) 70.1,36.55 ; v1(69.44,37.21) 70.1,37.87 ; v1(69.44,37.21) 68.78,37.87 ; 9.7,16.76 J8.1 ; J8.1 10.92,15.54 ; J8.1 10.92,17.98 ; J8.1 12.14,16.76 ; v1(20.65,13.74) 21.31,13.08 ; v1(20.65,13.74) 21.31,14.4 ; v1(20.65,13.74) 19.99,14.4 ; v1(20.65,13.74) 19.99,13.08 ; 56.97,7.8 v1(57.84,7.8) ; v1(57.84,7.8) 58.7,7.8 ; v1(57.84,7.8) 57.84,8.66 ; v1(57.84,7.8) 57.84,6.94 ; 92.81,30.76 v1(93.47,30.1) ; v1(93.47,30.1) 94.13,29.44 ; v1(93.47,30.1) 94.13,30.76 ; v1(93.47,30.1) 92.81,29.44 ; 71.22,2.82 v1(71.88,2.16) ; v1(71.88,2.16) 71.22,1.5 ; v1(71.88,2.16) 72.54,1.5 ; v1(71.88,2.16) 72.54,2.82 ; v1(2.03,14.86) 2.69,15.52 ; v1(2.03,14.86) 1.37,15.52 ; v1(2.03,14.86) 1.37,14.2 ; v1(2.03,14.86) 2.69,14.2 ; v1(89.02,14.82) 89.68,15.48 ; v1(89.02,14.82) 88.36,15.48 ; v1(89.02,14.82) 89.68,14.16 ; v1(89.02,14.82) 88.36,14.16 ; v1(53.09,14.86) 53.09,15.72 ; v1(53.09,14.86) 52.22,14.86 ; v1(53.09,14.86) 53.09,13.99 ; v1(53.09,14.86) 53.95,14.86 ; J22.2 87.07,29.46 ; J22.2 85.85,28.24 ; J22.2 85.85,30.68 ; J22.2 84.63,29.46 ; v1(42.16,12.32) 43.03,12.32 ; v1(42.16,12.32) 42.16,13.18 ; v1(42.16,12.32) 42.16,11.45 ; v1(42.16,12.32) 41.3,12.32 ; 41.02,13.11 v1(41.02,13.97) ; v1(41.02,13.97) 40.16,13.97 ; v1(41.02,13.97) 41.02,14.83 ; v1(41.02,13.97) 41.89,13.97 ; 10.26,1.5 v1(10.92,2.16) ; v1(10.92,2.16) 11.58,2.82 ; v1(10.92,2.16) 11.58,1.5 ; v1(10.92,2.16) 10.26,2.82 ; 33.12,38.33 v1(33.78,38.99) ; v1(33.78,38.99) 34.44,38.33 ; v1(33.78,38.99) 34.44,39.65 ; v1(33.78,38.99) 33.12,39.65 ; v1(50.56,12.99) 51.43,12.99 ; v1(50.56,12.99) 50.56,12.13 ; v1(50.56,12.99) 50.56,13.86 ; v1(50.56,12.99) 49.7,12.99 ; 86.46,2.82 v1(87.12,2.16) ; v1(87.12,2.16) 87.78,2.82 ; v1(87.12,2.16) 86.46,1.5 ; v1(87.12,2.16) 87.78,1.5 ; 90.77,23.1 v1(91.43,22.44) ; v1(91.43,22.44) 90.77,21.78 ; v1(91.43,22.44) 92.09,23.1 ; v1(91.43,22.44) 92.09,21.78 ; J16.2 78.23,20.52 ; J16.2 77.01,19.3 ; J16.2 78.23,18.08 ; J16.2 79.45,19.3 ; v1(2.03,30.1) 2.69,30.76 ; v1(2.03,30.1) 2.69,29.44 ; v1(2.03,30.1) 1.37,30.76 ; v1(2.03,30.1) 1.37,29.44 ; v1(76.96,2.16) 77.62,1.5 ; v1(76.96,2.16) 76.3,1.5 ; v1(76.96,2.16) 77.62,2.82 ; v1(76.96,2.16) 76.3,2.82 ; v1(74.42,38.99) 75.08,38.33 ; v1(74.42,38.99) 73.76,38.33 ; v1(74.42,38.99) 75.08,39.65 ; v1(74.42,38.99) 73.76,39.65 ; v1(26.16,38.99) 26.82,39.65 ; v1(26.16,38.99) 25.5,39.65 ; v1(26.16,38.99) 25.5,38.33 ; v1(26.16,38.99) 26.82,38.33 ; v1(43.94,38.99) 44.6,39.65 ; v1(43.94,38.99) 43.28,39.65 ; v1(43.94,38.99) 43.28,38.33 ; v1(43.94,38.99) 44.6,38.33 ; v1(59.28,37.21) 59.94,37.87 ; v1(59.28,37.21) 58.62,37.87 ; v1(59.28,37.21) 59.94,36.55 ; v1(59.28,37.21) 58.62,36.55 ; v1(49.02,38.99) 49.68,38.33 ; v1(49.02,38.99) 49.68,39.65 ; v1(49.02,38.99) 48.36,39.65 ; v1(49.02,38.99) 48.36,38.33 ; 71.22,38.33 v1(71.88,38.99) ; v1(71.88,38.99) 71.22,39.65 ; v1(71.88,38.99) 72.54,39.65 ; v1(71.88,38.99) 72.54,38.33 ; v1(4.51,25.05) 5.17,25.71 ; v1(4.51,25.05) 3.85,24.39 ; v1(4.51,25.05) 5.17,24.39 ; v1(4.51,25.05) 3.85,25.71 ; v1(54.1,38.99) 54.76,39.65 ; v1(54.1,38.99) 53.44,39.65 ; v1(54.1,38.99) 54.76,38.33 ; v1(54.1,38.99) 53.44,38.33 ; v1(89.02,22.44) 89.68,21.78 ; v1(89.02,22.44) 88.36,21.78 ; v1(89.02,22.44) 89.68,23.1 ; v1(89.02,22.44) 88.36,23.1 ; 62.05,7.8 v1(62.92,7.8) ; v1(62.92,7.8) 62.92,6.94 ; v1(62.92,7.8) 63.78,7.8 ; v1(62.92,7.8) 62.92,8.66 ; v1(61.72,38.99) 62.38,38.33 ; v1(61.72,38.99) 62.38,39.65 ; v1(61.72,38.99) 61.06,38.33 ; v1(61.72,38.99) 61.06,39.65 ; 12.8,2.82 v1(13.46,2.16) ; v1(13.46,2.16) 14.12,2.82 ; v1(13.46,2.16) 12.8,1.5 ; v1(13.46,2.16) 14.12,1.5 ; 29.06,10.69 v1(29.72,10.03) ; v1(29.72,10.03) 29.06,9.37 ; v1(29.72,10.03) 30.38,9.37 ; v1(29.72,10.03) 30.38,10.69 ; 88.36,19.24 v1(89.02,19.9) ; v1(89.02,19.9) 88.36,20.56 ; v1(89.02,19.9) 89.68,20.56 ; v1(89.02,19.9) 89.68,19.24 ; 76.75,5.22 v1(77.62,5.22) ; v1(77.62,5.22) 77.62,6.09 ; v1(77.62,5.22) 78.48,5.22 ; v1(77.62,5.22) 77.62,4.36 ; v1(53.11,7.84) 53.11,8.71 ; v1(53.11,7.84) 52.25,7.84 ; v1(53.11,7.84) 53.98,7.84 ; v1(53.11,7.84) 53.11,6.98 ; v1(41.34,32.25) 42,31.58 ; v1(41.34,32.25) 40.68,32.91 ; v1(41.34,32.25) 42,32.91 ; v1(41.34,32.25) 40.68,31.58 ; 50.57,6.98 v1(50.57,7.84) ; v1(50.57,7.84) 49.71,7.84 ; v1(50.57,7.84) 51.44,7.84 ; v1(50.57,7.84) 50.57,8.71 ; 12.44,13.34 v1(13.11,12.67) ; v1(13.11,12.67) 12.44,12.01 ; v1(13.11,12.67) 13.77,13.34 ; v1(13.11,12.67) 13.77,12.01 ; J17.2 78.23,17.98 ; J17.2 77.01,16.76 ; J17.2 78.23,15.54 ; J17.2 79.45,16.76 ; v1(39.62,24.51) 40.29,25.17 ; v1(39.62,24.51) 38.96,23.85 ; v1(39.62,24.51) 38.96,25.17 ; v1(39.62,24.51) 40.29,23.85 ; 49.71,5.3 v1(50.57,5.3) ; v1(50.57,5.3) 51.44,5.3 ; v1(50.57,5.3) 50.57,6.17 ; v1(50.57,5.3) 50.57,4.44 ; U13.1 7.37,4.19 ; U13.1 4.57,1.4 ; U13.1 1.78,4.19 ; U13.1 4.57,6.99 ; 75.1,4.34 v1(75.1,5.21) ; v1(75.1,5.21) 75.1,6.07 ; v1(75.1,5.21) 74.24,5.21 ; v1(75.1,5.21) 75.97,5.21 ; 77.01,14.22 J18.2 ; J18.2 78.23,15.44 ; J18.2 78.23,13 ; J18.2 79.45,14.22 ; v1(91.43,17.36) 92.09,16.7 ; v1(91.43,17.36) 90.77,16.7 ; v1(91.43,17.36) 92.09,18.02 ; v1(91.43,17.36) 90.77,18.02 ; v1(28.7,38.99) 29.36,38.33 ; v1(28.7,38.99) 28.04,39.65 ; v1(28.7,38.99) 29.36,39.65 ; v1(28.7,38.99) 28.04,38.33 ; v1(66.9,37.21) 67.56,37.87 ; v1(66.9,37.21) 67.56,36.55 ; v1(66.9,37.21) 66.24,37.87 ; v1(66.9,37.21) 66.24,36.55 ; 78.84,39.65 v1(79.5,38.99) ; v1(79.5,38.99) 80.16,39.65 ; v1(79.5,38.99) 78.84,38.33 ; v1(79.5,38.99) 80.16,38.33 ; v1(50.57,10.38) 50.57,11.25 ; v1(50.57,10.38) 51.44,10.38 ; v1(50.57,10.38) 49.71,10.38 ; v1(50.57,10.38) 50.57,9.52 ; v1(42.98,5.29) 43.84,5.29 ; v1(42.98,5.29) 42.98,6.15 ; v1(42.98,5.29) 42.12,5.29 ; v1(42.98,5.29) 42.98,4.42 ; v1(45.47,7.87) 46.33,7.87 ; v1(45.47,7.87) 44.6,7.87 ; v1(45.47,7.87) 45.47,8.74 ; v1(45.47,7.87) 45.47,7.01 ; v1(89.02,24.98) 89.68,25.64 ; v1(89.02,24.98) 88.36,25.64 ; v1(89.02,24.98) 88.36,24.32 ; v1(89.02,24.98) 89.68,24.32 ; 92.81,28.22 v1(93.47,27.56) ; v1(93.47,27.56) 94.13,26.9 ; v1(93.47,27.56) 92.81,26.9 ; v1(93.47,27.56) 94.13,28.22 ; 1.37,33.3 v1(2.03,32.64) ; v1(2.03,32.64) 2.69,31.98 ; v1(2.03,32.64) 1.37,31.98 ; v1(2.03,32.64) 2.69,33.3 ; v1(48.03,5.3) 48.9,5.3 ; v1(48.03,5.3) 48.03,4.44 ; v1(48.03,5.3) 48.03,6.17 ; v1(48.03,5.3) 47.17,5.3 ; 16.08,5.28 v1(16.74,5.94) ; v1(16.74,5.94) 17.4,6.61 ; v1(16.74,5.94) 16.08,6.61 ; v1(16.74,5.94) 17.4,5.28 ; 30.58,39.65 v1(31.24,38.99) ; v1(31.24,38.99) 31.9,38.33 ; v1(31.24,38.99) 31.9,39.65 ; v1(31.24,38.99) 30.58,38.33 ; 63.7,36.1 v1(64.36,35.43) ; v1(64.36,35.43) 65.02,36.1 ; v1(64.36,35.43) 65.02,34.77 ; v1(64.36,35.43) 63.7,34.77 ; v1(91.43,14.82) 92.09,15.48 ; v1(91.43,14.82) 90.77,14.16 ; v1(91.43,14.82) 92.09,14.16 ; v1(91.43,14.82) 90.77,15.48 ; 20.42,38.33 v1(21.08,38.99) ; v1(21.08,38.99) 21.74,39.65 ; v1(21.08,38.99) 20.42,39.65 ; v1(21.08,38.99) 21.74,38.33 ; 17.88,38.33 v1(18.54,38.99) ; v1(18.54,38.99) 19.2,38.33 ; v1(18.54,38.99) 19.2,39.65 ; v1(18.54,38.99) 17.88,39.65 ; v1(66.8,2.16) 67.46,2.82 ; v1(66.8,2.16) 66.14,2.82 ; v1(66.8,2.16) 67.46,1.5 ; v1(66.8,2.16) 66.14,1.5 ; v1(46.48,2.16) 47.14,2.82 ; v1(46.48,2.16) 45.82,1.5 ; v1(46.48,2.16) 45.82,2.82 ; v1(46.48,2.16) 47.14,1.5 ; 83.92,39.65 v1(84.58,38.99) ; v1(84.58,38.99) 85.24,38.33 ; v1(84.58,38.99) 83.92,38.33 ; v1(84.58,38.99) 85.24,39.65 ; v1(18.54,2.16) 19.2,1.5 ; v1(18.54,2.16) 19.2,2.82 ; v1(18.54,2.16) 17.88,1.5 ; v1(18.54,2.16) 17.88,2.82 ; 15.98,9.75 v1(16.64,10.41) ; v1(16.64,10.41) 17.3,11.08 ; v1(16.64,10.41) 17.3,9.75 ; v1(16.64,10.41) 15.98,11.08 ; v1(2.03,12.32) 2.69,12.98 ; v1(2.03,12.32) 2.69,11.66 ; v1(2.03,12.32) 1.37,11.66 ; v1(2.03,12.32) 1.37,12.98 ; J13.2 79.45,26.92 ; J13.2 78.23,28.14 ; J13.2 78.23,25.7 ; J13.2 77.01,26.92 ; v1(53.34,21.97) 54,22.63 ; v1(53.34,21.97) 52.68,21.31 ; v1(53.34,21.97) 52.68,22.63 ; v1(53.34,21.97) 54,21.31 ; v1(69.34,2.16) 70,2.82 ; v1(69.34,2.16) 68.68,2.82 ; v1(69.34,2.16) 68.68,1.5 ; v1(69.34,2.16) 70,1.5 ; 77.01,24.38 J14.2 ; J14.2 79.45,24.38 ; J14.2 78.23,23.16 ; J14.2 78.23,25.6 ; 15.37,18.69 v1(15.37,19.56) ; v1(15.37,19.56) 16.23,19.56 ; v1(15.37,19.56) 14.5,19.56 ; v1(15.37,19.56) 15.37,20.42 ; 38.2,38.33 v1(38.86,38.99) ; v1(38.86,38.99) 39.52,39.65 ; v1(38.86,38.99) 39.52,38.33 ; v1(38.86,38.99) 38.2,39.65 ; 72.56,4.34 v1(72.56,5.21) ; v1(72.56,5.21) 72.56,6.07 ; v1(72.56,5.21) 73.43,5.21 ; v1(72.56,5.21) 71.7,5.21 ; 40.68,31.59 v1(41.34,30.92) ; v1(41.34,30.92) 40.68,30.26 ; v1(41.34,30.92) 42,30.26 ; v1(41.34,30.92) 42,31.59 ; v1(74.42,2.16) 75.08,2.82 ; v1(74.42,2.16) 73.76,2.82 ; v1(74.42,2.16) 73.76,1.5 ; v1(74.42,2.16) 75.08,1.5 ; 92.81,19.28 v1(93.47,19.94) ; v1(93.47,19.94) 94.13,19.28 ; v1(93.47,19.94) 92.81,20.6 ; v1(93.47,19.94) 94.13,20.6 ; 33.81,27.94 v1(34.67,27.94) ; v1(34.67,27.94) 35.54,27.94 ; v1(34.67,27.94) 34.67,27.08 ; v1(34.67,27.94) 34.67,28.8 ; 50.55,18.57 v1(50.55,19.43) ; v1(50.55,19.43) 49.68,19.43 ; v1(50.55,19.43) 50.55,20.3 ; v1(50.55,19.43) 51.41,19.43 ; 83.92,1.5 v1(84.58,2.16) ; v1(84.58,2.16) 83.92,2.82 ; v1(84.58,2.16) 85.24,1.5 ; v1(84.58,2.16) 85.24,2.82 ; 58.52,39.65 v1(59.18,38.99) ; v1(59.18,38.99) 59.84,38.33 ; v1(59.18,38.99) 59.84,39.65 ; v1(59.18,38.99) 58.52,38.33 ; v1(2.03,25.02) 2.69,25.68 ; v1(2.03,25.02) 2.69,24.36 ; v1(2.03,25.02) 1.37,25.68 ; v1(2.03,25.02) 1.37,24.36 ; 81.38,1.5 v1(82.04,2.16) ; v1(82.04,2.16) 82.7,2.82 ; v1(82.04,2.16) 81.38,2.82 ; v1(82.04,2.16) 82.7,1.5 ; J26.2 87.07,19.3 ; J26.2 85.85,18.08 ; J26.2 85.85,20.52 ; J26.2 84.63,19.3 ; 66.14,39.65 v1(66.8,38.99) ; v1(66.8,38.99) 67.46,38.33 ; v1(66.8,38.99) 67.46,39.65 ; v1(66.8,38.99) 66.14,38.33 ; 92.81,10.44 v1(93.47,9.78) ; v1(93.47,9.78) 92.81,9.12 ; v1(93.47,9.78) 94.13,10.44 ; v1(93.47,9.78) 94.13,9.12 ; 37.69,23.65 v1(38.35,22.99) ; v1(38.35,22.99) 39.02,22.33 ; v1(38.35,22.99) 39.02,23.65 ; v1(38.35,22.99) 37.69,22.33 ; 92.81,33.3 v1(93.47,32.64) ; v1(93.47,32.64) 92.81,31.98 ; v1(93.47,32.64) 94.13,33.3 ; v1(93.47,32.64) 94.13,31.98 ; 85.85,20.62 J25.2 ; J25.2 87.07,21.84 ; J25.2 84.63,21.84 ; J25.2 85.85,23.06 ; 22.2,7.9 v1(22.86,7.24) ; v1(22.86,7.24) 22.2,6.58 ; v1(22.86,7.24) 23.52,7.9 ; v1(22.86,7.24) 23.52,6.58 ; 30.58,2.82 v1(31.24,2.16) ; v1(31.24,2.16) 31.9,2.82 ; v1(31.24,2.16) 31.9,1.5 ; v1(31.24,2.16) 30.58,1.5 ; v1(48.03,10.38) 48.9,10.38 ; v1(48.03,10.38) 48.03,9.52 ; v1(48.03,10.38) 47.17,10.38 ; v1(48.03,10.38) 48.03,11.25 ; v1(49.09,30.19) 49.75,29.53 ; v1(49.09,30.19) 48.42,30.85 ; v1(49.09,30.19) 49.75,30.85 ; v1(49.09,30.19) 48.42,29.53 ; 54.51,31.37 v1(55.37,31.37) ; v1(55.37,31.37) 55.37,30.5 ; v1(55.37,31.37) 56.24,31.37 ; v1(55.37,31.37) 55.37,32.23 ; 40.74,38.33 v1(41.4,38.99) ; v1(41.4,38.99) 40.74,39.65 ; v1(41.4,38.99) 42.06,38.33 ; v1(41.4,38.99) 42.06,39.65 ; U3.1 9.55,7.01 ; U3.1 8.36,5.82 ; U3.1 7.16,7.01 ; U3.1 8.36,8.2 ; v1(2.03,19.94) 2.69,20.6 ; v1(2.03,19.94) 2.69,19.28 ; v1(2.03,19.94) 1.37,20.6 ; v1(2.03,19.94) 1.37,19.28 ; 43.28,2.82 v1(43.94,2.16) ; v1(43.94,2.16) 44.6,1.5 ; v1(43.94,2.16) 44.6,2.82 ; v1(43.94,2.16) 43.28,1.5 ; 3.85,23.17 v1(4.51,22.51) ; v1(4.51,22.51) 5.17,23.17 ; v1(4.51,22.51) 3.85,21.85 ; v1(4.51,22.51) 5.17,21.85 ; v1(51.56,38.99) 52.22,39.65 ; v1(51.56,38.99) 52.22,38.33 ; v1(51.56,38.99) 50.9,39.65 ; v1(51.56,38.99) 50.9,38.33 ; v1(36.32,2.16) 36.98,1.5 ; v1(36.32,2.16) 36.98,2.82 ; v1(36.32,2.16) 35.66,2.82 ; v1(36.32,2.16) 35.66,1.5 ; J20.2 79.45,9.14 ; J20.2 78.23,10.36 ; J20.2 78.23,7.92 ; J20.2 77.01,9.14 ; J23.2 85.85,28.14 ; J23.2 85.85,25.7 ; J23.2 84.63,26.92 ; J23.2 87.07,26.92 ; v1(40.44,5.29) 40.44,6.15 ; v1(40.44,5.29) 39.58,5.29 ; v1(40.44,5.29) 40.44,4.42 ; v1(40.44,5.29) 41.3,5.29 ; 92.81,12.98 v1(93.47,12.32) ; v1(93.47,12.32) 94.13,12.98 ; v1(93.47,12.32) 92.81,11.66 ; v1(93.47,12.32) 94.13,11.66 ; 76.3,39.65 v1(76.96,38.99) ; v1(76.96,38.99) 76.3,38.33 ; v1(76.96,38.99) 77.62,39.65 ; v1(76.96,38.99) 77.62,38.33 ; 10.26,39.65 v1(10.92,38.99) ; v1(10.92,38.99) 10.26,38.33 ; v1(10.92,38.99) 11.58,39.65 ; v1(10.92,38.99) 11.58,38.33 ; 59.51,5.21 v1(60.37,5.21) ; v1(60.37,5.21) 60.37,6.07 ; v1(60.37,5.21) 61.24,5.21 ; v1(60.37,5.21) 60.37,4.34 ; v1(60.38,7.8) 60.38,8.66 ; v1(60.38,7.8) 59.51,7.8 ; v1(60.38,7.8) 60.38,6.94 ; v1(60.38,7.8) 61.24,7.8 ; 77.01,32 J11.2 ; J11.2 78.23,33.22 ; J11.2 79.45,32 ; J11.2 78.23,30.78 ; v1(49.28,20.7) 50.14,20.7 ; v1(49.28,20.7) 49.28,19.84 ; v1(49.28,20.7) 48.41,20.7 ; v1(49.28,20.7) 49.28,21.57 ; 63.6,39.65 v1(64.26,38.99) ; v1(64.26,38.99) 63.6,38.33 ; v1(64.26,38.99) 64.92,39.65 ; v1(64.26,38.99) 64.92,38.33 ; v1(49.02,2.16) 49.68,2.82 ; v1(49.02,2.16) 48.36,1.5 ; v1(49.02,2.16) 49.68,1.5 ; v1(49.02,2.16) 48.36,2.82 ; 15.34,38.33 v1(16,38.99) ; v1(16,38.99) 15.34,39.65 ; v1(16,38.99) 16.66,39.65 ; v1(16,38.99) 16.66,38.33 ; J27.2 87.07,16.76 ; J27.2 85.85,15.54 ; J27.2 84.63,16.76 ; J27.2 85.85,17.98 ; v1(53.1,12.99) 53.97,12.99 ; v1(53.1,12.99) 52.24,12.99 ; v1(53.1,12.99) 53.1,12.13 ; v1(53.1,12.99) 53.1,13.86 ; 1.37,16.74 v1(2.03,17.4) ; v1(2.03,17.4) 1.37,18.06 ; v1(2.03,17.4) 2.69,16.74 ; v1(2.03,17.4) 2.69,18.06 ; 90.77,20.56 v1(91.43,19.9) ; v1(91.43,19.9) 92.09,19.24 ; v1(91.43,19.9) 92.09,20.56 ; v1(91.43,19.9) 90.77,19.24 ; v1(44.33,22.81) 44.99,22.15 ; v1(44.33,22.81) 43.67,22.15 ; v1(44.33,22.81) 44.99,23.47 ; v1(44.33,22.81) 43.67,23.47 ; v1(56.64,38.99) 57.3,38.33 ; v1(56.64,38.99) 55.98,39.65 ; v1(56.64,38.99) 55.98,38.33 ; v1(56.64,38.99) 57.3,39.65 ; U14.1 90.93,6.99 ; U14.1 88.14,4.19 ; U14.1 93.73,4.19 ; U14.1 90.93,1.4 ; J15.2 79.45,21.84 ; J15.2 77.01,21.84 ; J15.2 78.23,23.06 ; J15.2 78.23,20.62 ; 84.63,32 J21.2 ; J21.2 85.85,30.78 ; J21.2 85.85,33.22 ; J21.2 87.07,32 ; v1(54.1,2.16) 54.76,2.82 ; v1(54.1,2.16) 54.76,1.5 ; v1(54.1,2.16) 53.44,2.82 ; v1(54.1,2.16) 53.44,1.5 ; 7.16,10.41 J10.1 ; J10.1 9.6,10.41 ; J10.1 8.38,11.63 ; J10.1 8.38,9.19 ; v1(61.82,37.21) 62.48,37.87 ; v1(61.82,37.21) 62.48,36.55 ; v1(61.82,37.21) 61.16,37.87 ; v1(61.82,37.21) 61.16,36.55 ; 92.81,23.14 v1(93.47,22.48) ; v1(93.47,22.48) 94.13,23.14 ; v1(93.47,22.48) 92.81,21.82 ; v1(93.47,22.48) 94.13,21.82 ; v1(51.82,20.7) 52.68,20.7 ; v1(51.82,20.7) 50.95,20.7 ; v1(51.82,20.7) 51.82,19.84 ; v1(51.82,20.7) 51.82,21.57 ; v1(93.47,14.86) 94.13,14.2 ; v1(93.47,14.86) 92.81,14.2 ; v1(93.47,14.86) 92.81,15.52 ; v1(93.47,14.86) 94.13,15.52 ; v1(50.55,21.97) 50.55,22.84 ; v1(50.55,21.97) 50.55,21.11 ; v1(50.55,21.97) 51.41,21.97 ; v1(50.55,21.97) 49.68,21.97 ; 22.96,2.82 v1(23.62,2.16) ; v1(23.62,2.16) 24.28,2.82 ; v1(23.62,2.16) 22.96,1.5 ; v1(23.62,2.16) 24.28,1.5 ; 31.7,20.35 v1(32.36,19.69) ; v1(32.36,19.69) 33.02,20.35 ; v1(32.36,19.69) 31.7,19.02 ; v1(32.36,19.69) 33.02,19.02 ; 49.68,14.86 v1(50.55,14.86) ; v1(50.55,14.86) 50.55,15.72 ; v1(50.55,14.86) 50.55,13.99 ; v1(50.55,14.86) 51.41,14.86 ; 17.65,18.69 v1(17.65,19.56) ; v1(17.65,19.56) 16.79,19.56 ; v1(17.65,19.56) 18.52,19.56 ; v1(17.65,19.56) 17.65,20.42 ; v1(93.47,25.02) 94.13,24.36 ; v1(93.47,25.02) 94.13,25.68 ; v1(93.47,25.02) 92.81,24.36 ; v1(93.47,25.02) 92.81,25.68 ; 33.12,1.5 v1(33.78,2.16) ; v1(33.78,2.16) 33.12,2.82 ; v1(33.78,2.16) 34.44,1.5 ; v1(33.78,2.16) 34.44,2.82 ; 58.62,34.77 v1(59.28,35.43) ; v1(59.28,35.43) 59.94,36.1 ; v1(59.28,35.43) 59.94,34.77 ; v1(59.28,35.43) 58.62,36.1 ; v1(50.93,31.37) 51.59,30.71 ; v1(50.93,31.37) 50.27,32.03 ; v1(50.93,31.37) 50.27,30.71 ; 67.96,4.36 v1(67.96,5.22) ; v1(67.96,5.22) 68.83,5.22 ; v1(67.96,5.22) 67.1,5.22 ; v1(67.96,5.22) 67.96,6.09 ; 88.36,18.02 v1(89.02,17.36) ; v1(89.02,17.36) 88.36,16.7 ; v1(89.02,17.36) 89.68,16.7 ; v1(89.02,17.36) 89.68,18.02 ; v1(51.56,2.16) 52.22,1.5 ; v1(51.56,2.16) 50.9,2.82 ; v1(51.56,2.16) 52.22,2.82 ; v1(51.56,2.16) 50.9,1.5 ; v1(8.38,38.99) 9.04,39.65 ; v1(8.38,38.99) 7.72,39.65 ; v1(8.38,38.99) 7.72,38.33 ; v1(8.38,38.99) 9.04,38.33 ; v1(35.18,31.24) 35.18,32.11 ; v1(35.18,31.24) 36.04,31.24 ; v1(35.18,31.24) 35.18,30.38 ; v1(35.18,31.24) 34.31,31.24 ; 15.34,1.5 v1(16,2.16) ; v1(16,2.16) 16.66,1.5 ; v1(16,2.16) 15.34,2.82 ; v1(16,2.16) 16.66,2.82 ; 36.98,31.24 v1(37.85,31.24) ; v1(37.85,31.24) 37.85,30.38 ; v1(37.85,31.24) 38.71,31.24 ; v1(37.85,31.24) 37.85,32.11 ; v1(24.38,29.34) 25.05,28.68 ; v1(24.38,29.34) 25.05,30 ; v1(24.38,29.34) 23.72,28.68 ; v1(24.38,29.34) 23.72,30 ; v1(93.47,17.4) 94.13,18.06 ; v1(93.47,17.4) 94.13,16.74 ; v1(93.47,17.4) 92.81,16.74 ; v1(93.47,17.4) 92.81,18.06 ; 12.44,10.21 v1(13.11,10.87) ; v1(13.11,10.87) 12.44,11.53 ; v1(13.11,10.87) 13.77,10.21 ; v1(13.11,10.87) 13.77,11.53 ; v1(69.34,38.99) 70,38.33 ; v1(69.34,38.99) 68.68,38.33 ; v1(69.34,38.99) 68.68,39.65 ; v1(69.34,38.99) 70,39.65 ; 55.98,1.5 v1(56.64,2.16) ; v1(56.64,2.16) 57.3,2.82 ; v1(56.64,2.16) 57.3,1.5 ; v1(56.64,2.16) 55.98,2.82 ; v1(79.5,2.16) 80.16,1.5 ; v1(79.5,2.16) 80.16,2.82 ; v1(79.5,2.16) 78.84,1.5 ; v1(79.5,2.16) 78.84,2.82 ; 57.83,4.34 v1(57.83,5.21) ; v1(57.83,5.21) 56.97,5.21 ; v1(57.83,5.21) 58.7,5.21 ; v1(57.83,5.21) 57.83,6.07 ; v1(38.86,2.16) 39.52,1.5 ; v1(38.86,2.16) 38.2,1.5 ; v1(38.86,2.16) 39.52,2.82 ; v1(38.86,2.16) 38.2,2.82 ; v1(59.18,2.16) 59.84,2.82 ; v1(59.18,2.16) 58.52,2.82 ; v1(59.18,2.16) 58.52,1.5 ; v1(59.18,2.16) 59.84,1.5 ; v1(46.61,14.35) 47.27,13.69 ; v1(46.61,14.35) 45.95,15.01 ; v1(46.61,14.35) 45.95,13.69 ; v1(46.61,14.35) 47.27,15.01 ; 35.66,38.33 v1(36.32,38.99) ; v1(36.32,38.99) 36.98,38.33 ; v1(36.32,38.99) 35.66,39.65 ; v1(36.32,38.99) 36.98,39.65 ; U6.3 10.91,22.76 ; U6.3 10.91,20.39 ; U6.3 12.1,21.57 ; U6.3 9.73,21.57 ; v1(45.52,5.29) 46.38,5.29 ; v1(45.52,5.29) 45.52,4.42 ; v1(45.52,5.29) 44.66,5.29 ; v1(45.52,5.29) 45.52,6.15 ; 84.63,24.38 J24.2 ; J24.2 87.07,24.38 ; J24.2 85.85,25.6 ; J24.2 85.85,23.16 ; 3.85,20.63 v1(4.51,19.97) ; v1(4.51,19.97) 5.17,20.63 ; v1(4.51,19.97) 5.17,19.31 ; v1(4.51,19.97) 3.85,19.31 ; 31.04,13.74 v1(31.7,14.4) ; v1(31.7,14.4) 32.36,15.06 ; v1(31.7,14.4) 31.04,15.06 ; v1(31.7,14.4) 32.36,13.74 ; 68.78,34.77 v1(69.44,35.43) ; v1(69.44,35.43) 70.1,36.1 ; v1(69.44,35.43) 70.1,34.77 ; v1(69.44,35.43) 68.78,36.1 ; v1(65.42,5.22) 65.42,6.09 ; v1(65.42,5.22) 66.29,5.22 ; v1(65.42,5.22) 64.56,5.22 ; v1(65.42,5.22) 65.42,4.36 ; v1(29.72,7.24) 30.38,6.58 ; v1(29.72,7.24) 30.38,7.9 ; v1(29.72,7.24) 29.06,6.58 ; v1(29.72,7.24) 29.06,7.9 ; v1(48.03,7.84) 48.03,8.71 ; v1(48.03,7.84) 47.17,7.84 ; v1(48.03,7.84) 48.03,6.98 ; v1(48.03,7.84) 48.9,7.84 ; 53.14,33.3 v1(53.8,32.64) ; v1(53.8,32.64) 54.46,31.98 ; v1(53.8,32.64) 53.14,31.98 ; v1(53.8,32.64) 54.46,33.3 ; J29.2 85.85,12.9 ; J29.2 85.85,10.46 ; J29.2 87.07,11.68 ; J29.2 84.63,11.68 ; 81.83,5.22 v1(82.7,5.22) ; v1(82.7,5.22) 83.56,5.22 ; v1(82.7,5.22) 82.7,6.09 ; v1(82.7,5.22) 82.7,4.36 ; 88.14,36.96 U15.1 ; U15.1 93.73,36.96 ; U15.1 90.93,34.16 ; U15.1 90.93,39.75 ; 22.96,39.65 v1(23.62,38.99) ; v1(23.62,38.99) 24.28,39.65 ; v1(23.62,38.99) 24.28,38.33 ; v1(23.62,38.99) 22.96,38.33 ; v1(26.16,2.16) 26.82,2.82 ; v1(26.16,2.16) 26.82,1.5 ; v1(26.16,2.16) 25.5,1.5 ; v1(26.16,2.16) 25.5,2.82 ; 63.7,37.87 v1(64.36,37.21) ; v1(64.36,37.21) 65.02,36.55 ; v1(64.36,37.21) 65.02,37.87 ; v1(64.36,37.21) 63.7,36.55 ; 43.79,25.81 v1(44.45,25.15) ; v1(44.45,25.15) 45.11,25.81 ; v1(44.45,25.15) 45.11,24.48 ; v1(44.45,25.15) 43.79,24.48 ; 12.8,38.33 v1(13.46,38.99) ; v1(13.46,38.99) 14.12,39.65 ; v1(13.46,38.99) 12.8,39.65 ; v1(13.46,38.99) 14.12,38.33 ; v1(2.03,9.78) 2.69,9.12 ; v1(2.03,9.78) 1.37,9.12 ; v1(2.03,9.78) 1.37,10.44 ; v1(2.03,9.78) 2.69,10.44 ; 84.63,9.14 J30.2 ; J30.2 87.07,9.14 ; J30.2 85.85,10.36 ; J30.2 85.85,7.92 ; 12.24,7.01 U3.3 ; U3.3 13.44,5.82 ; U3.3 14.63,7.01 ; 50.34,33.91 J1.1 ; J1.1 52.78,33.91 ; J1.1 51.56,35.13 ; 62.88,4.36 v1(62.88,5.22) ; v1(62.88,5.22) 63.75,5.22 ; v1(62.88,5.22) 62.88,6.09 ; v1(62.88,5.22) 62.02,5.22 ; 79.29,5.22 v1(80.16,5.22) ; v1(80.16,5.22) 80.16,4.36 ; v1(80.16,5.22) 81.02,5.22 ; v1(80.16,5.22) 80.16,6.09 ; 47.15,29.53 v1(47.82,30.19) ; v1(47.82,30.19) 47.15,30.85 ; v1(47.82,30.19) 48.48,30.85 ; v1(47.82,30.19) 48.48,29.53 ; 90.77,25.64 v1(91.43,24.98) ; v1(91.43,24.98) 92.09,24.32 ; v1(91.43,24.98) 90.77,24.32 ; v1(91.43,24.98) 92.09,25.64 ; 20.42,1.5 v1(21.08,2.16) ; v1(21.08,2.16) 21.74,1.5 ; v1(21.08,2.16) 20.42,2.82 ; v1(21.08,2.16) 21.74,2.82 ; 1.37,7.9 v1(2.03,7.24) ; v1(2.03,7.24) 2.69,6.58 ; v1(2.03,7.24) 2.69,7.9 ; v1(2.03,7.24) 1.37,6.58 ; 45.82,38.33 v1(46.48,38.99) ; v1(46.48,38.99) 47.14,38.33 ; v1(46.48,38.99) 45.82,39.65 ; v1(46.48,38.99) 47.14,39.65 ; 52.25,5.3 v1(53.11,5.3) ; v1(53.11,5.3) 53.11,4.44 ; v1(53.11,5.3) 53.98,5.3 ; v1(53.11,5.3) 53.11,6.17 ; 28.04,1.5 v1(28.7,2.16) ; v1(28.7,2.16) 29.36,1.5 ; v1(28.7,2.16) 28.04,2.82 ; v1(28.7,2.16) 29.36,2.82 ; J12.2 78.23,30.68 ; J12.2 77.01,29.46 ; J12.2 79.45,29.46 ; J12.2 78.23,28.24 ; 1.37,26.9 v1(2.03,27.56) ; v1(2.03,27.56) 2.69,26.9 ; v1(2.03,27.56) 1.37,28.22 ; v1(2.03,27.56) 2.69,28.22 ; v1(56.74,37.21) 57.4,37.87 ; v1(56.74,37.21) 57.4,36.55 ; v1(56.74,37.21) 56.08,36.55 ; v1(56.74,37.21) 56.08,37.87 ; v1(61.72,2.16) 62.38,2.82 ; v1(61.72,2.16) 61.06,1.5 ; v1(61.72,2.16) 62.38,1.5 ; v1(61.72,2.16) 61.06,2.82 ; v1(87.12,38.99) 87.78,39.65 ; v1(87.12,38.99) 87.78,38.33 ; v1(87.12,38.99) 86.46,39.65 ; v1(87.12,38.99) 86.46,38.33 ; 52.25,10.38 v1(53.11,10.38) ; v1(53.11,10.38) 53.11,9.52 ; v1(53.11,10.38) 53.98,10.38 ; v1(53.11,10.38) 53.11,11.25 ; v1(61.82,35.43) 62.48,34.77 ; v1(61.82,35.43) 62.48,36.1 ; v1(61.82,35.43) 61.16,34.77 ; v1(61.82,35.43) 61.16,36.1 ; 92.81,6.58 v1(93.47,7.24) ; v1(93.47,7.24) 94.13,7.9 ; v1(93.47,7.24) 92.81,7.9 ; v1(93.47,7.24) 94.13,6.58 ; v1(56.74,35.43) 57.4,34.77 ; v1(56.74,35.43) 57.4,36.1 ; v1(56.74,35.43) 56.08,34.77 ; v1(56.74,35.43) 56.08,36.1 ; v1(82.04,38.99) 82.7,38.33 ; v1(82.04,38.99) 82.7,39.65 ; v1(82.04,38.99) 81.38,38.33 ; v1(82.04,38.99) 81.38,39.65 ; v1(66.9,35.43) 67.56,36.1 ; v1(66.9,35.43) 66.24,34.77 ; v1(66.9,35.43) 67.56,34.77 ; v1(66.9,35.43) 66.24,36.1 ; 23.52,10.69 v1(22.86,10.03) 23.52,9.37 ; 40.74,2.82 v1(41.4,2.16) ; v1(41.4,2.16) 40.74,1.5 ; v1(41.4,2.16) 42.06,1.5 ; v1(41.4,2.16) 42.06,2.82 ; U11.1 7.37,36.96 ; U11.1 4.57,39.75 ; U11.1 4.57,34.16 ; U11.1 1.78,36.96 ; v1(8.38,2.16) 9.04,2.82 ; v1(8.38,2.16) 9.04,1.5 ; v1(8.38,2.16) 7.72,2.82 ; v1(8.38,2.16) 7.72,1.5 ; 21.77,33.91 22.99,33.91 ; 22.99,33.91 24.21,33.91 ; 22.99,33.91 22.99,35.13 ; 22.99,33.91 22.99,32.69 ; 63.6,1.5 v1(64.26,2.16) ; v1(64.26,2.16) 64.92,2.82 ; v1(64.26,2.16) 63.6,2.82 ; v1(64.26,2.16) 64.92,1.5 ; J28.2 85.85,15.44 ; J28.2 84.63,14.22 ; J28.2 87.07,14.22 ; J28.2 85.85,13 ; J19.2 79.45,11.68 ; J19.2 78.23,10.46 ; J19.2 77.01,11.68 ; J19.2 78.23,12.9 ; 28.04,31.34 R26.1 ; R26.1 29.24,32.54 ; R26.1 30.43,31.34 ; R26.1 29.24,30.15 ; 26.34,24.89 Q1.2 26.34,22 ; v1(55.29,5.21) 56.16,5.21 ; v1(55.29,5.21) 55.29,6.07 ; v1(55.29,5.21) 55.29,4.34 ; v1(55.29,5.21) 54.43,5.21
  BOTTOM w0.381: J1.1 51.56,32 v1(50.93,31.37)
